# Altium PCB PCB1.PcbDoc
Units mm, origin at the board's own origin, x right, y up, seen from the top; angles counter-clockwise.
Board outline 127.25 x 101.7 mm, 8 copper layers (L1, L2, L3, L4, L5, L6, L7, L8), stack 1.058 mm thick; 57 components, 43 nets, 244 pads, 157 vias.
Unrouted connection lines stored in the file: 9.
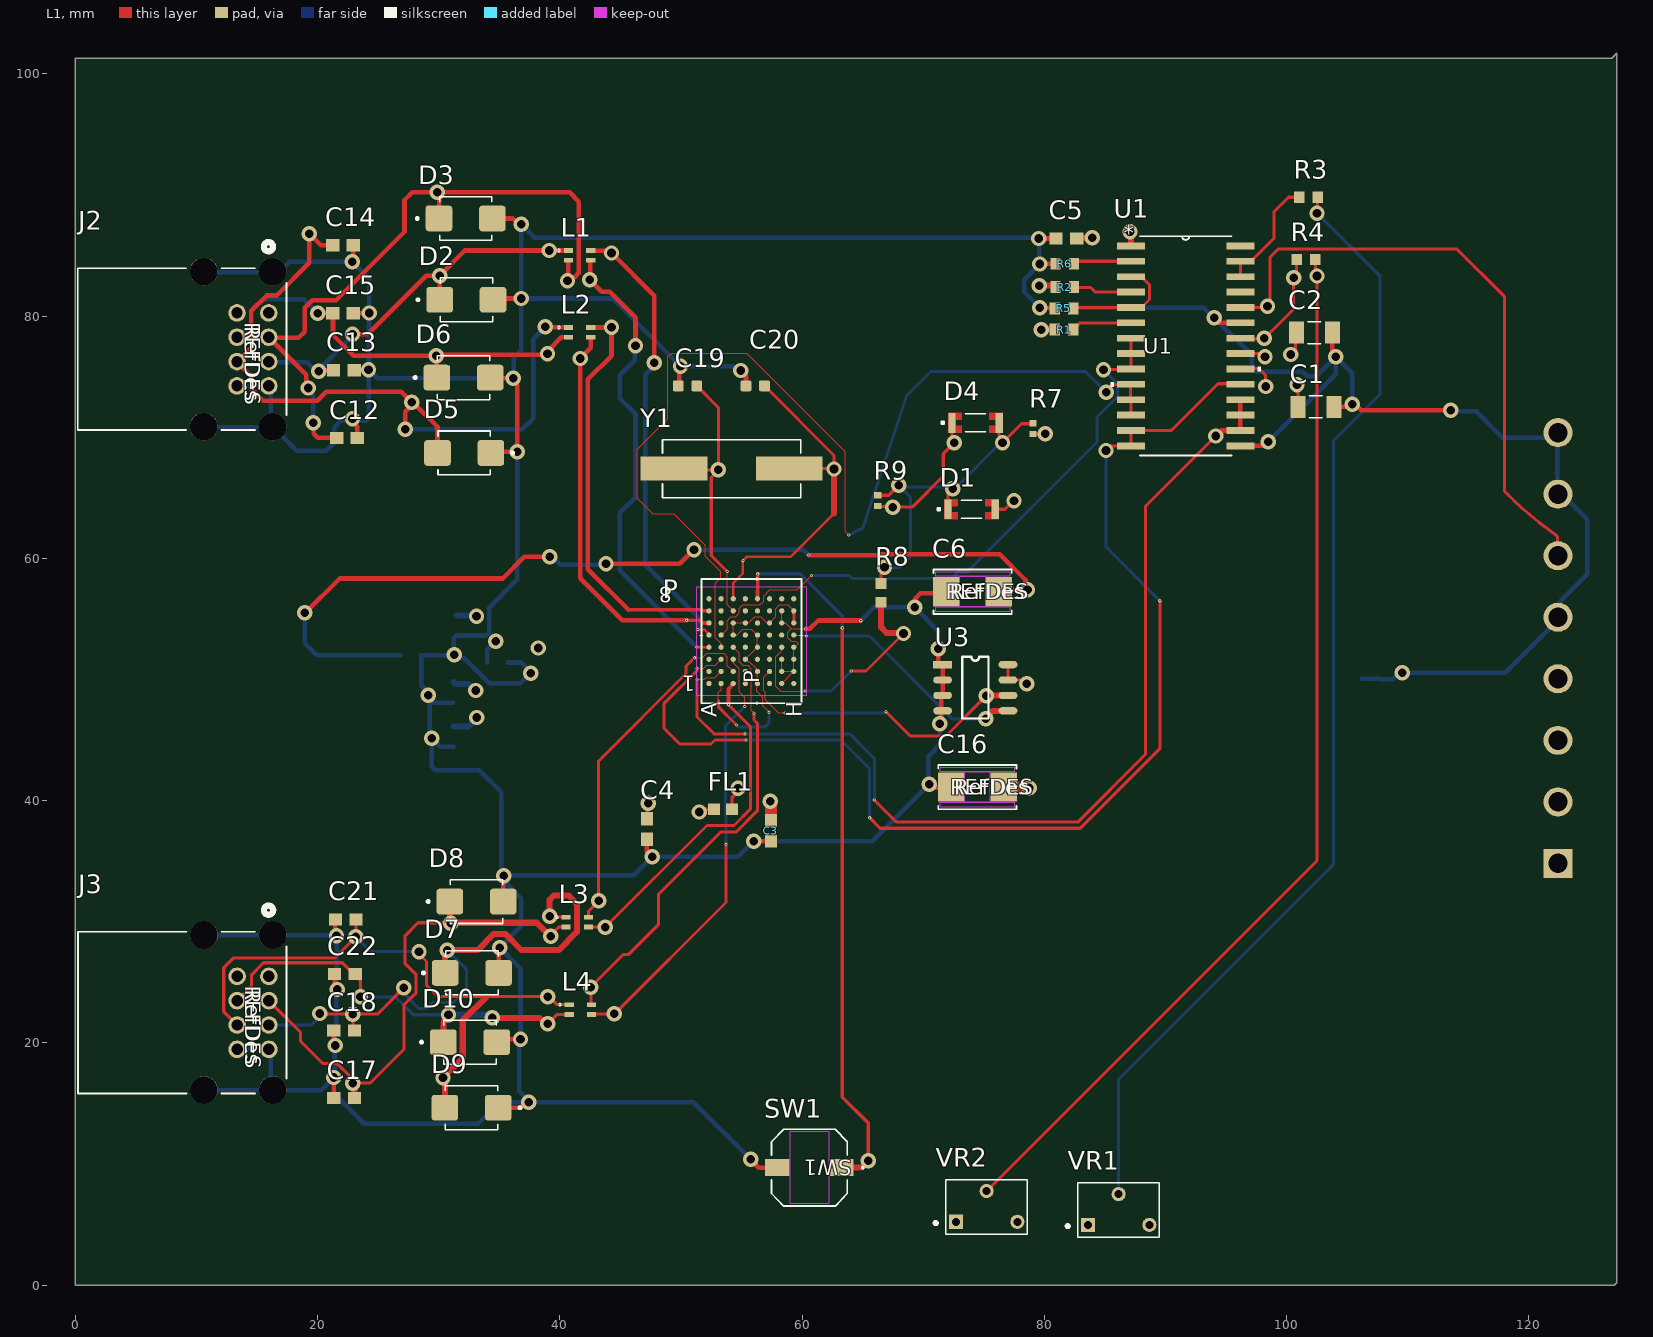
[diagram p0: L1 view]
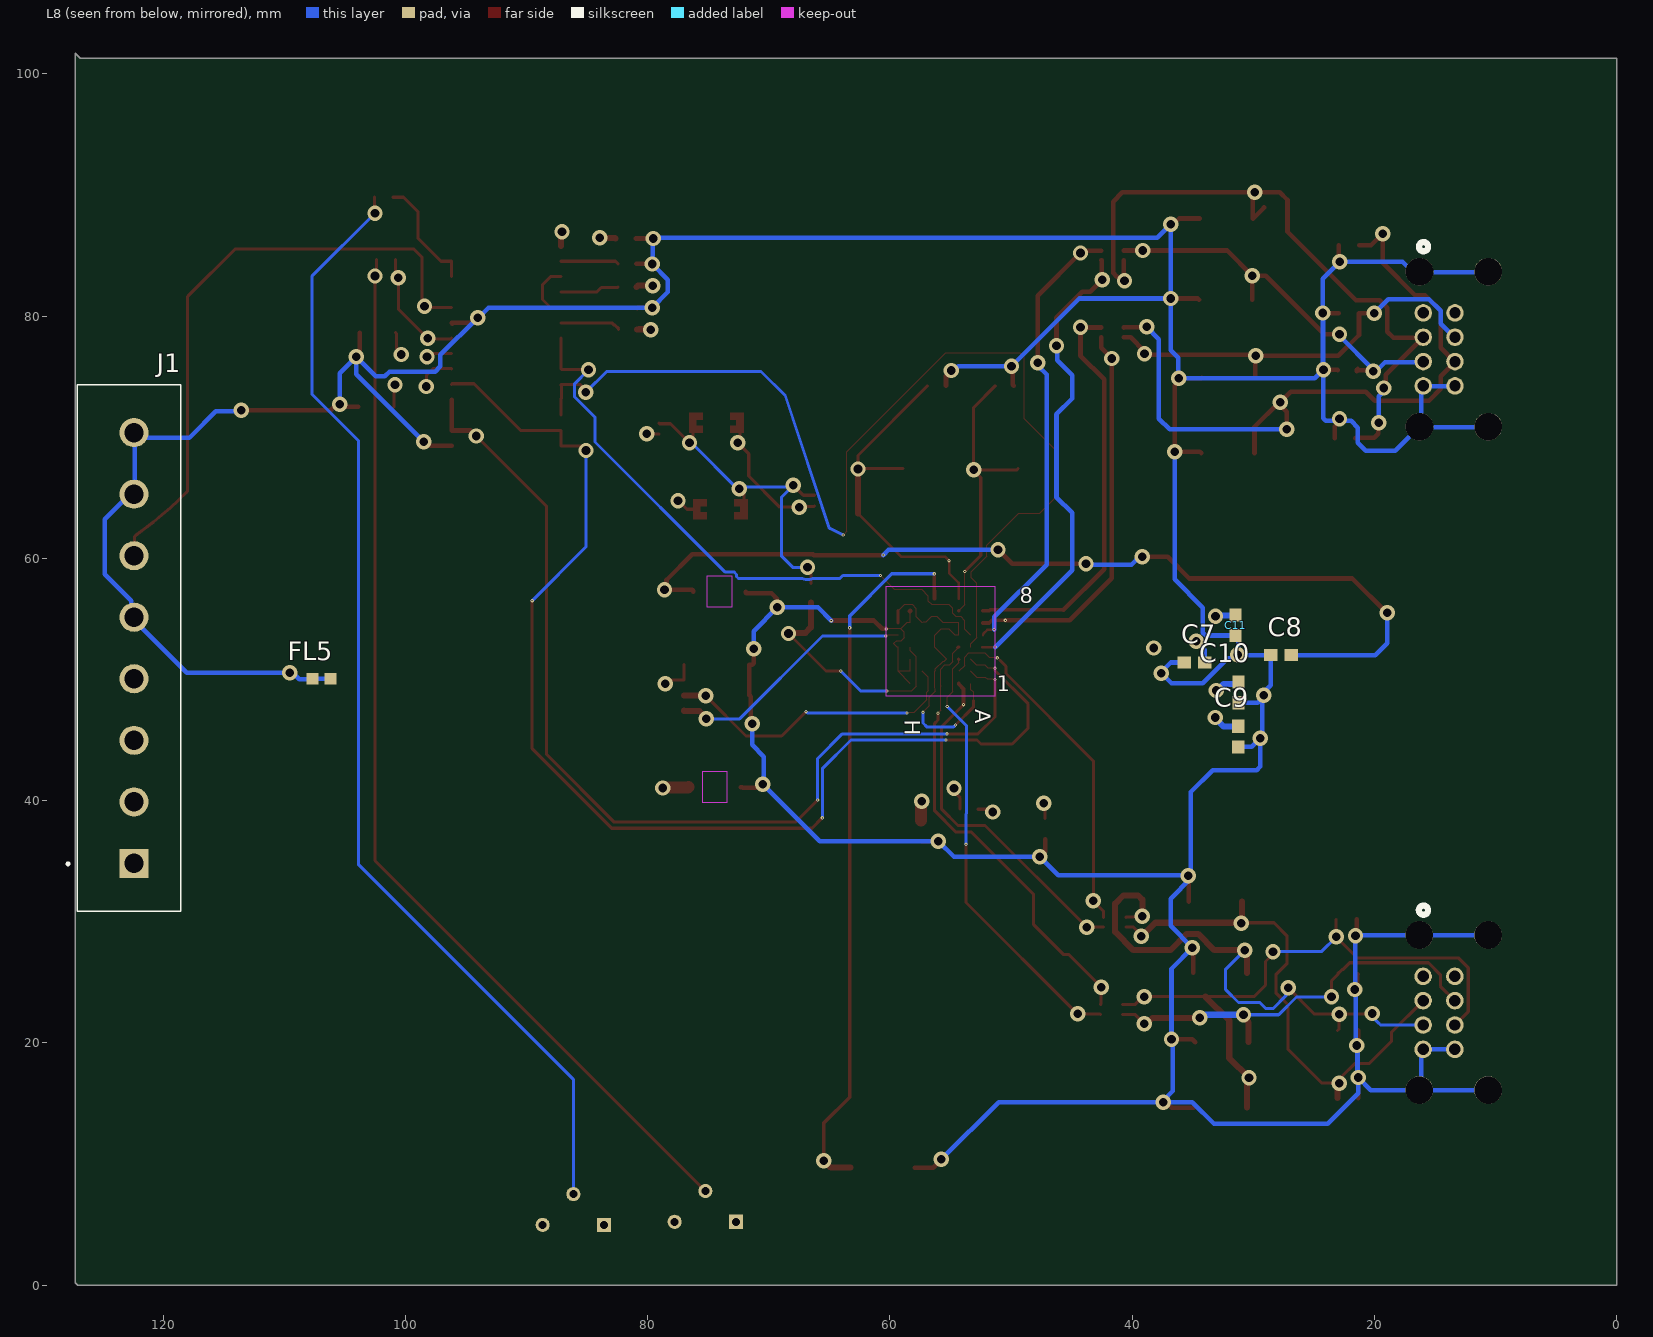
[diagram p1: L8 view, seen from below]
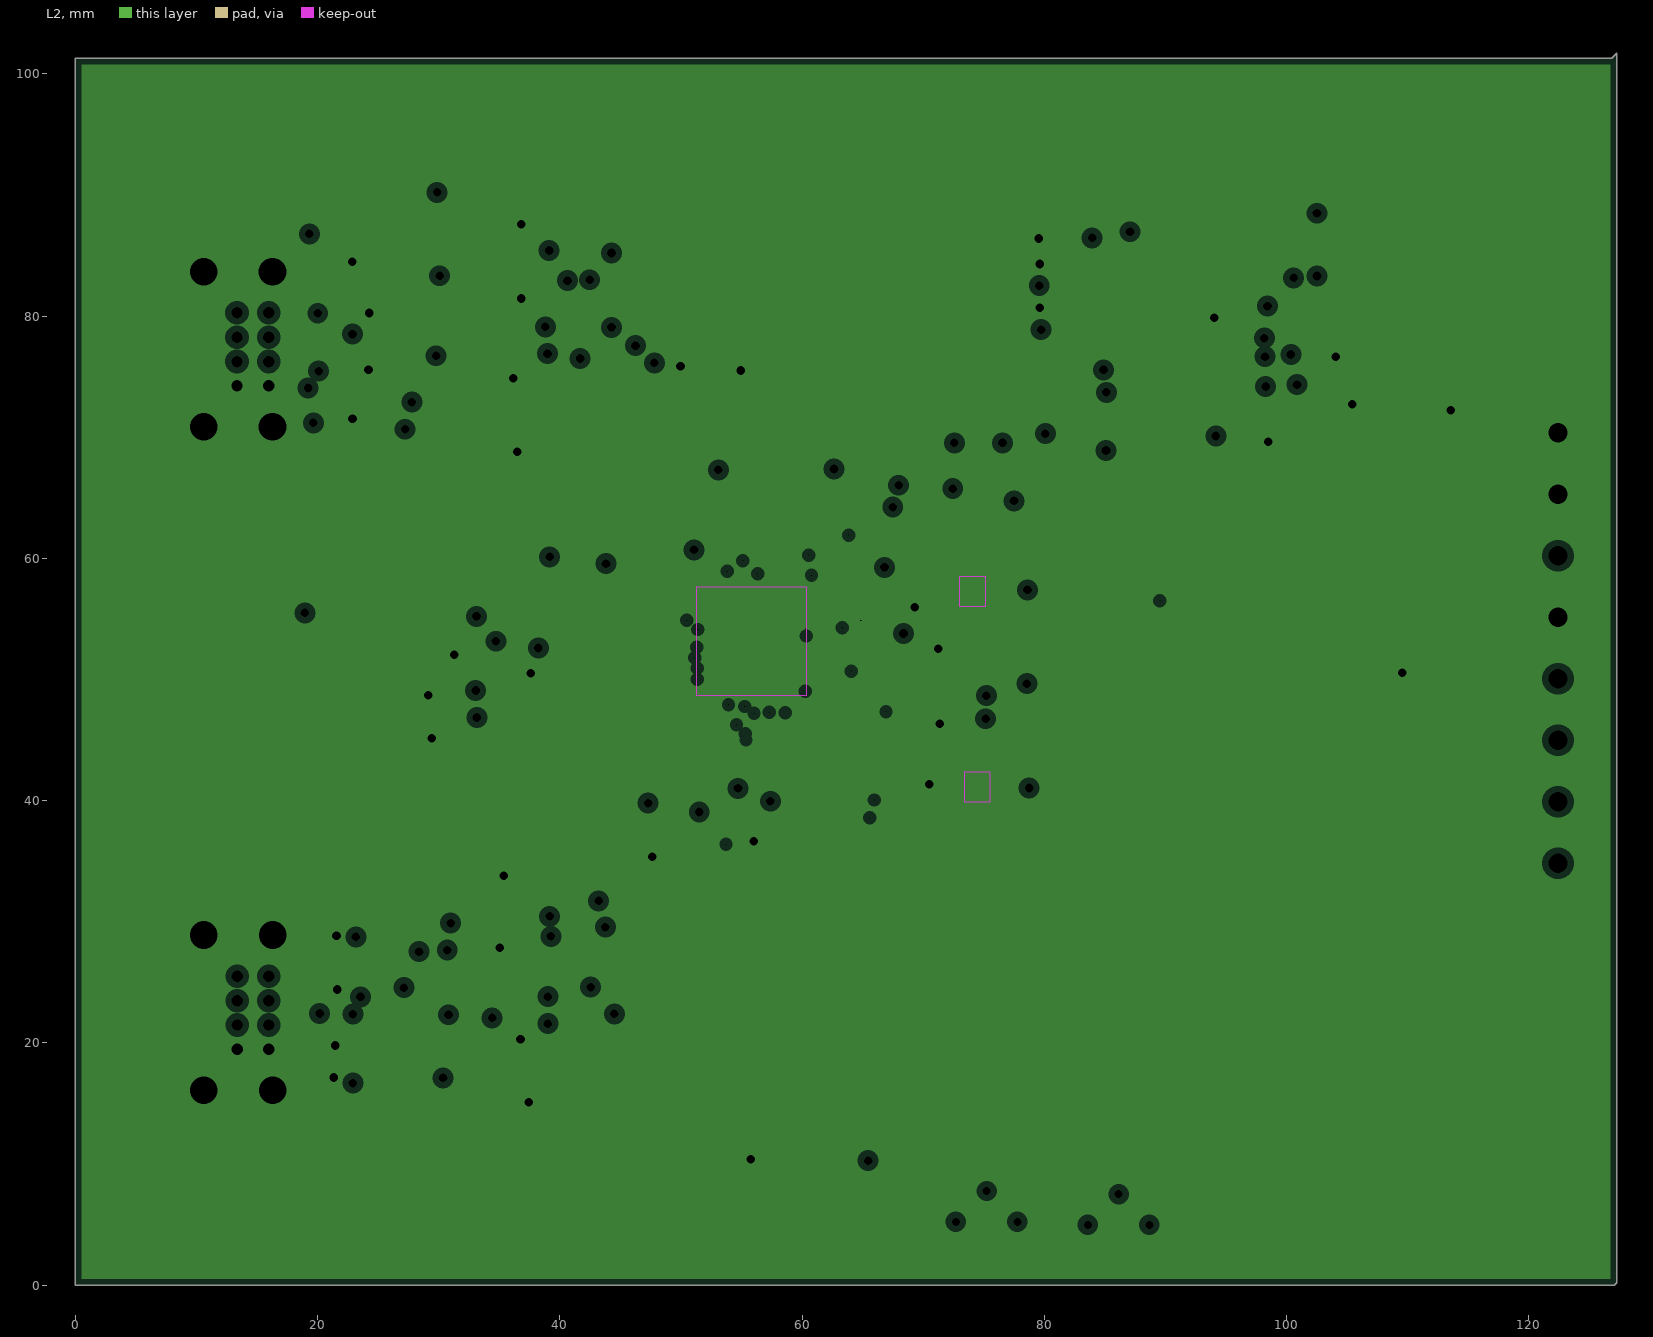
[diagram p2: L2, clearances drawn from the general rule]
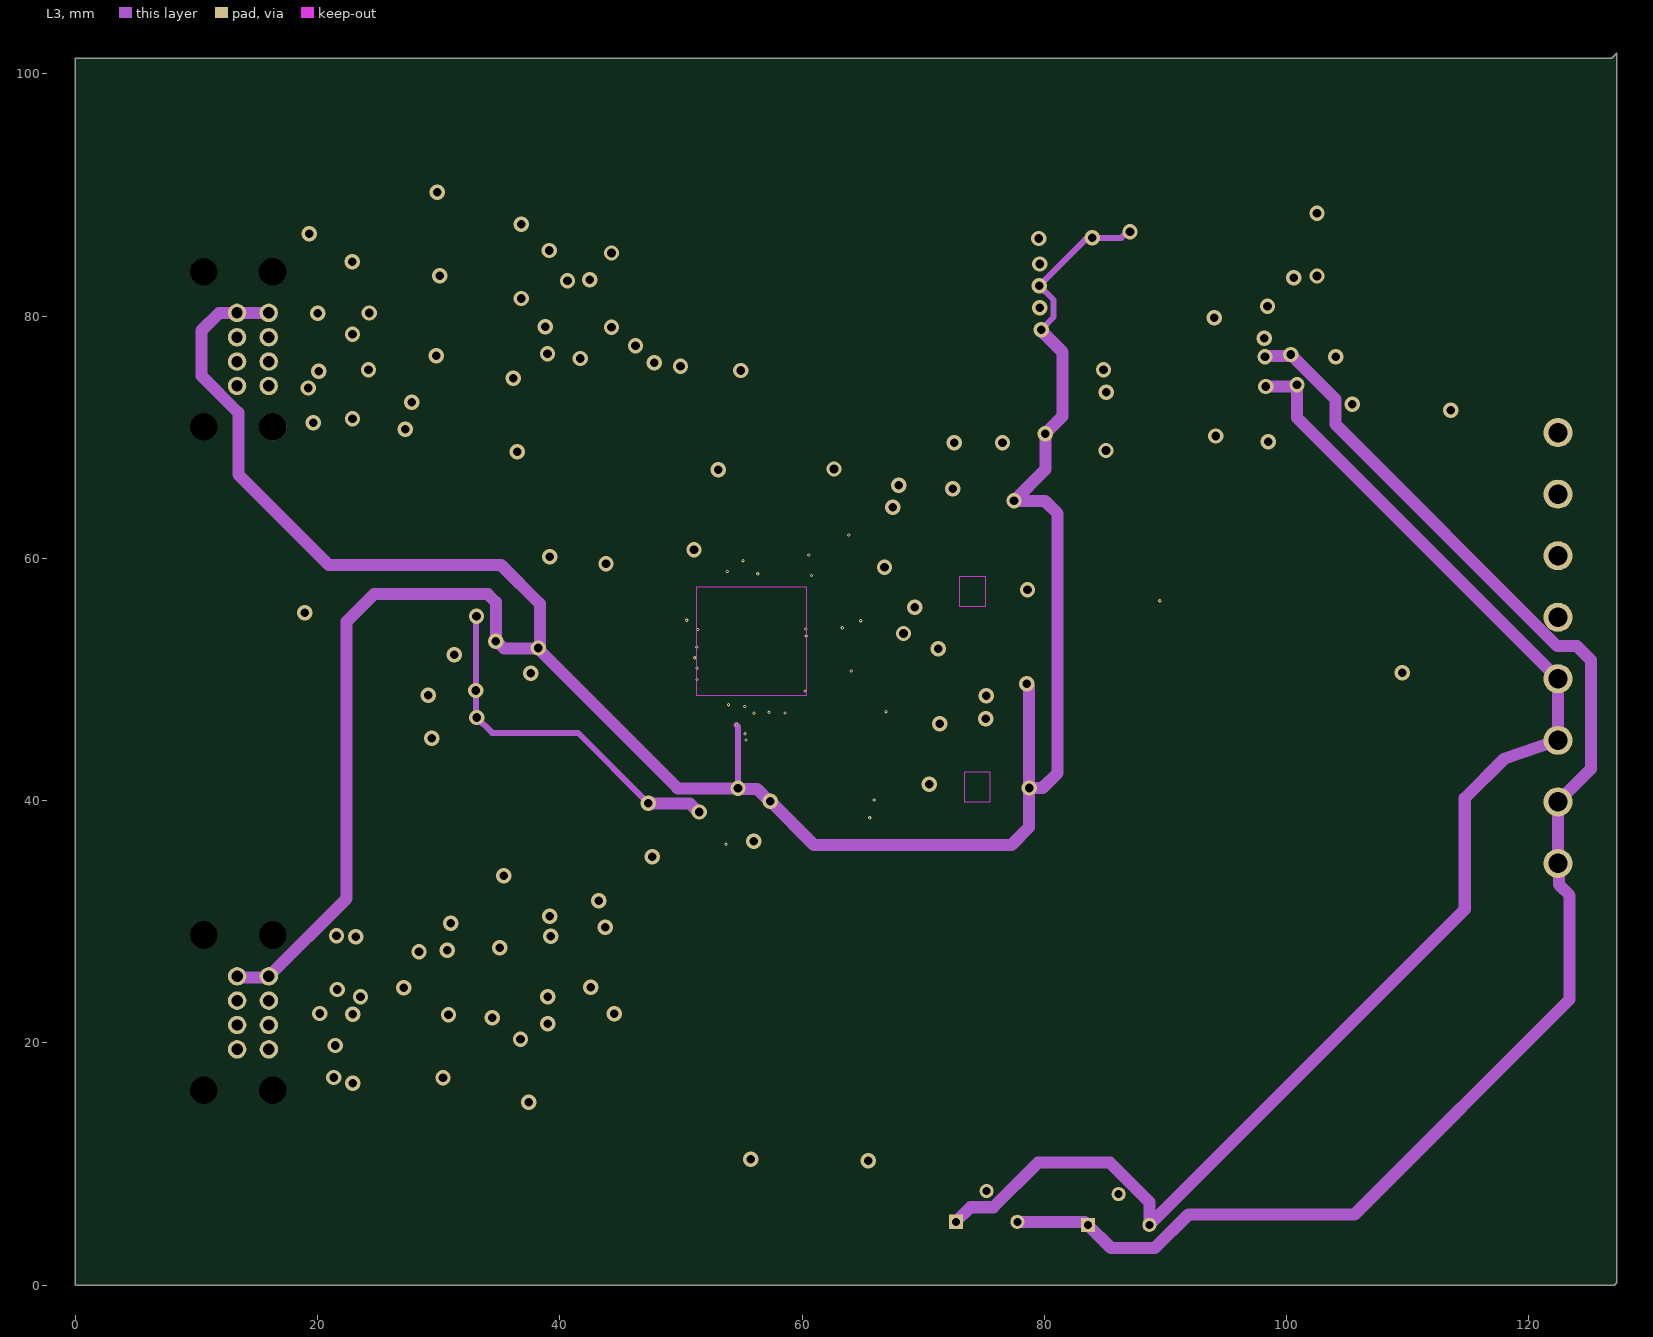
[diagram p3: L3]
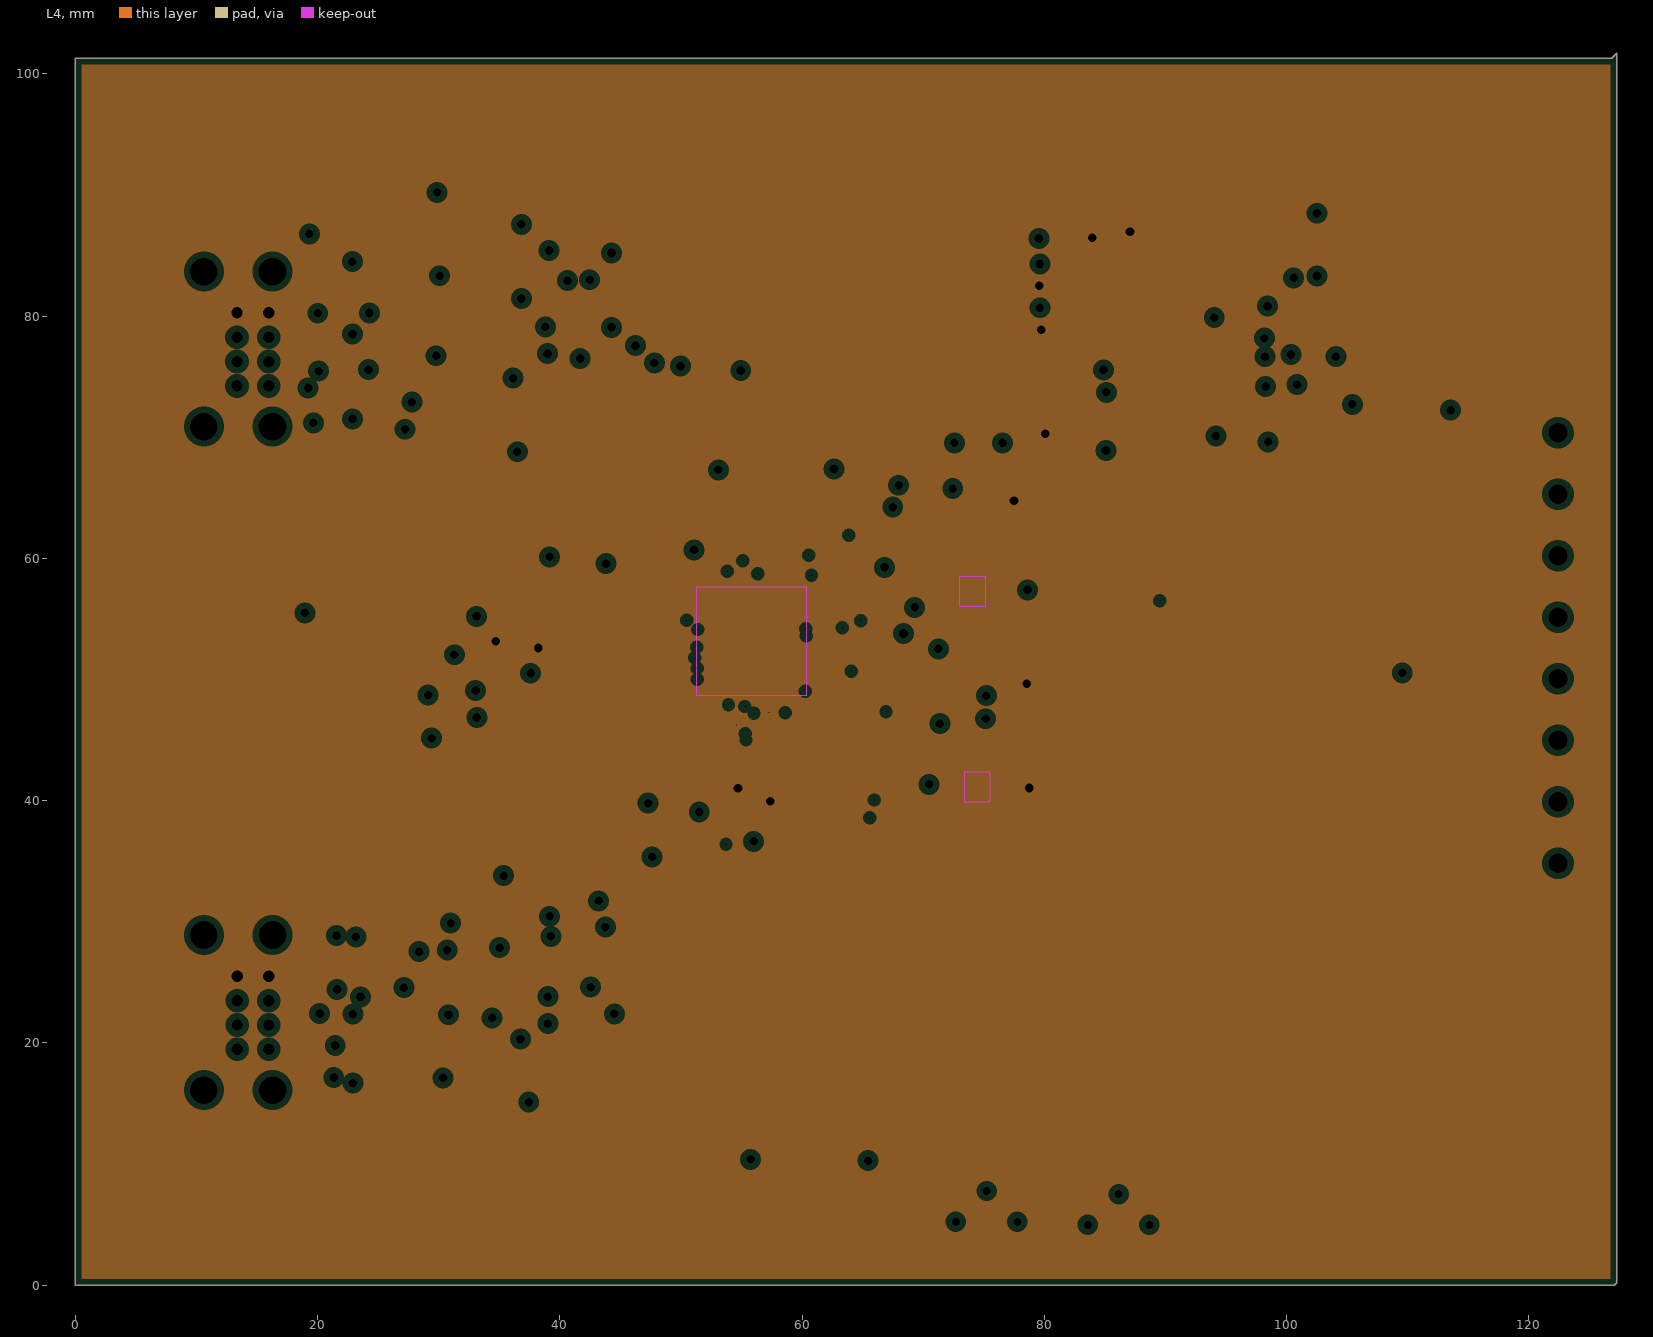
[diagram p4: L4, clearances drawn from the general rule]
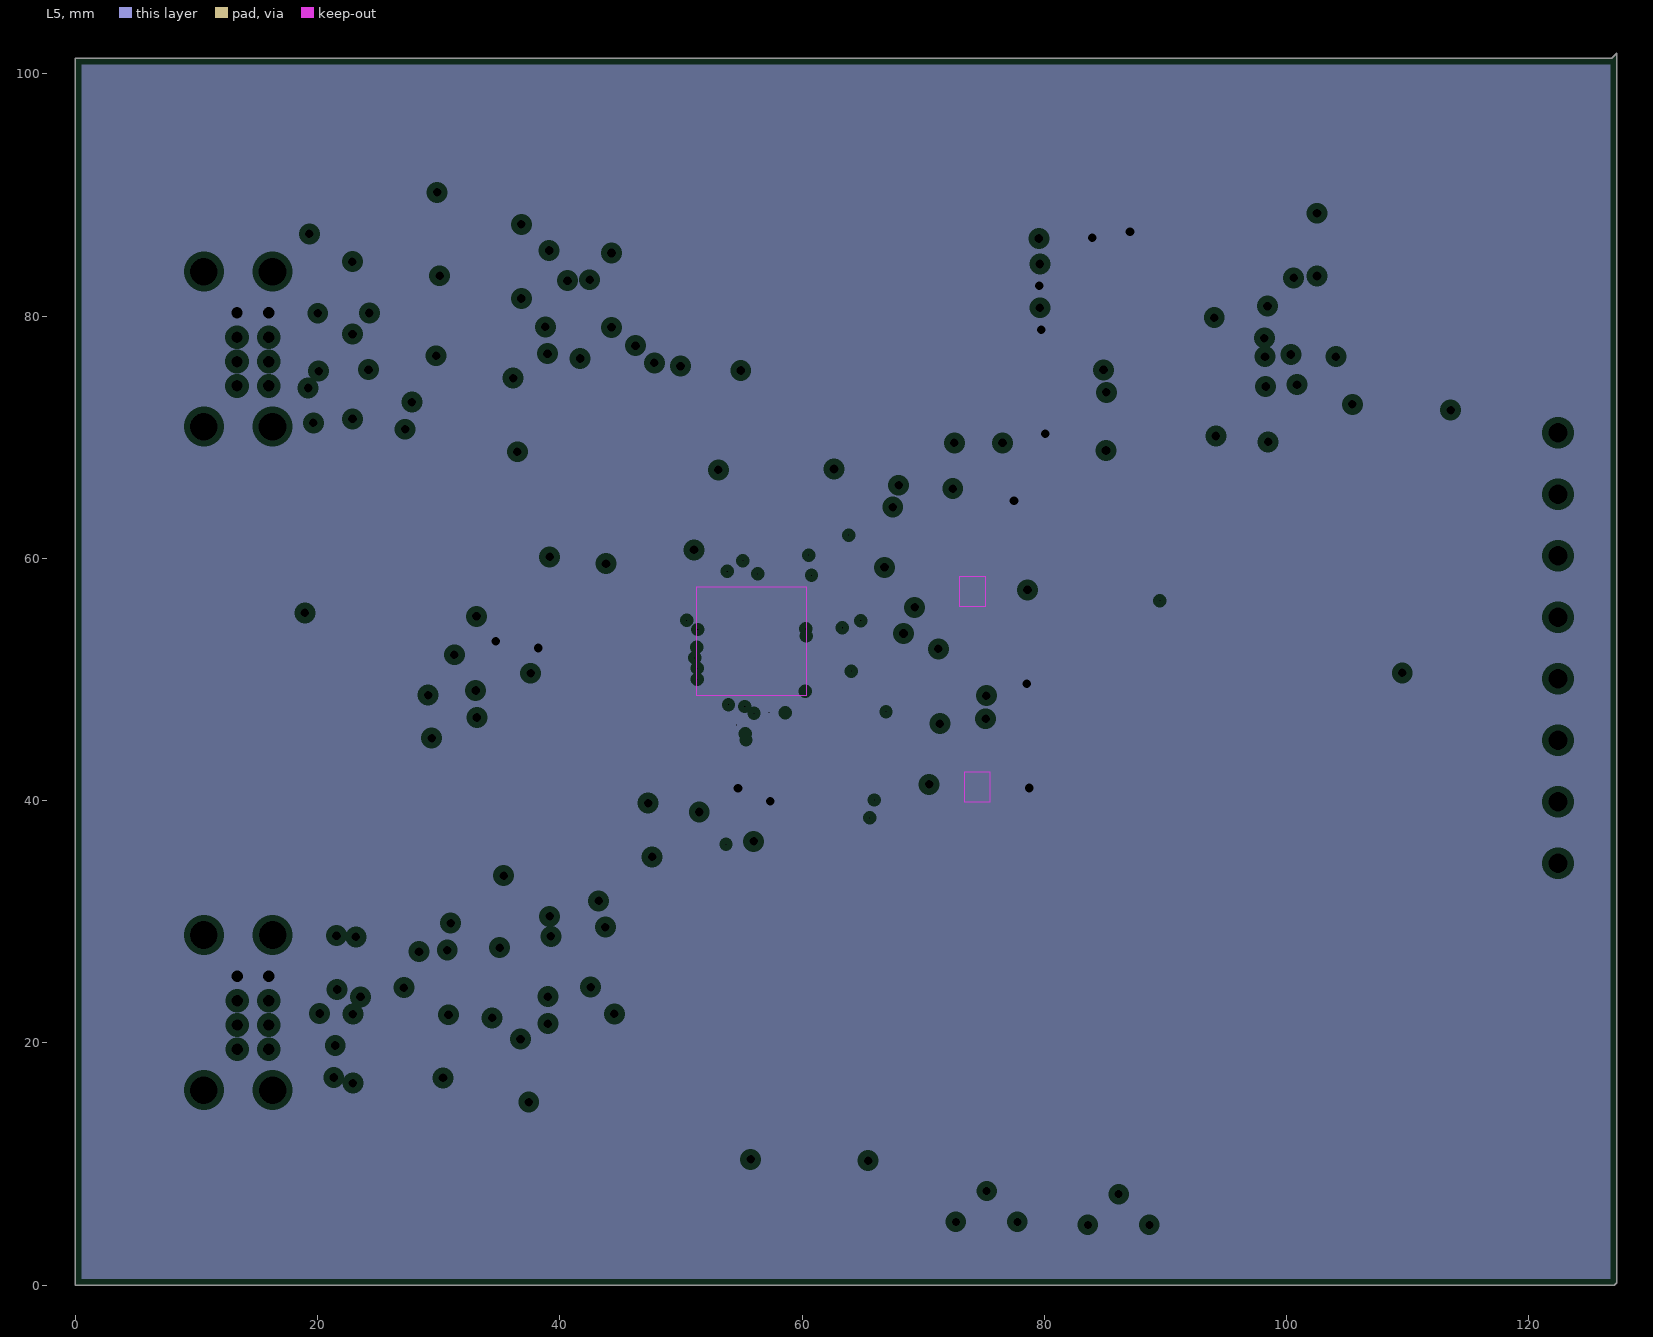
[diagram p5: L5, clearances drawn from the general rule]
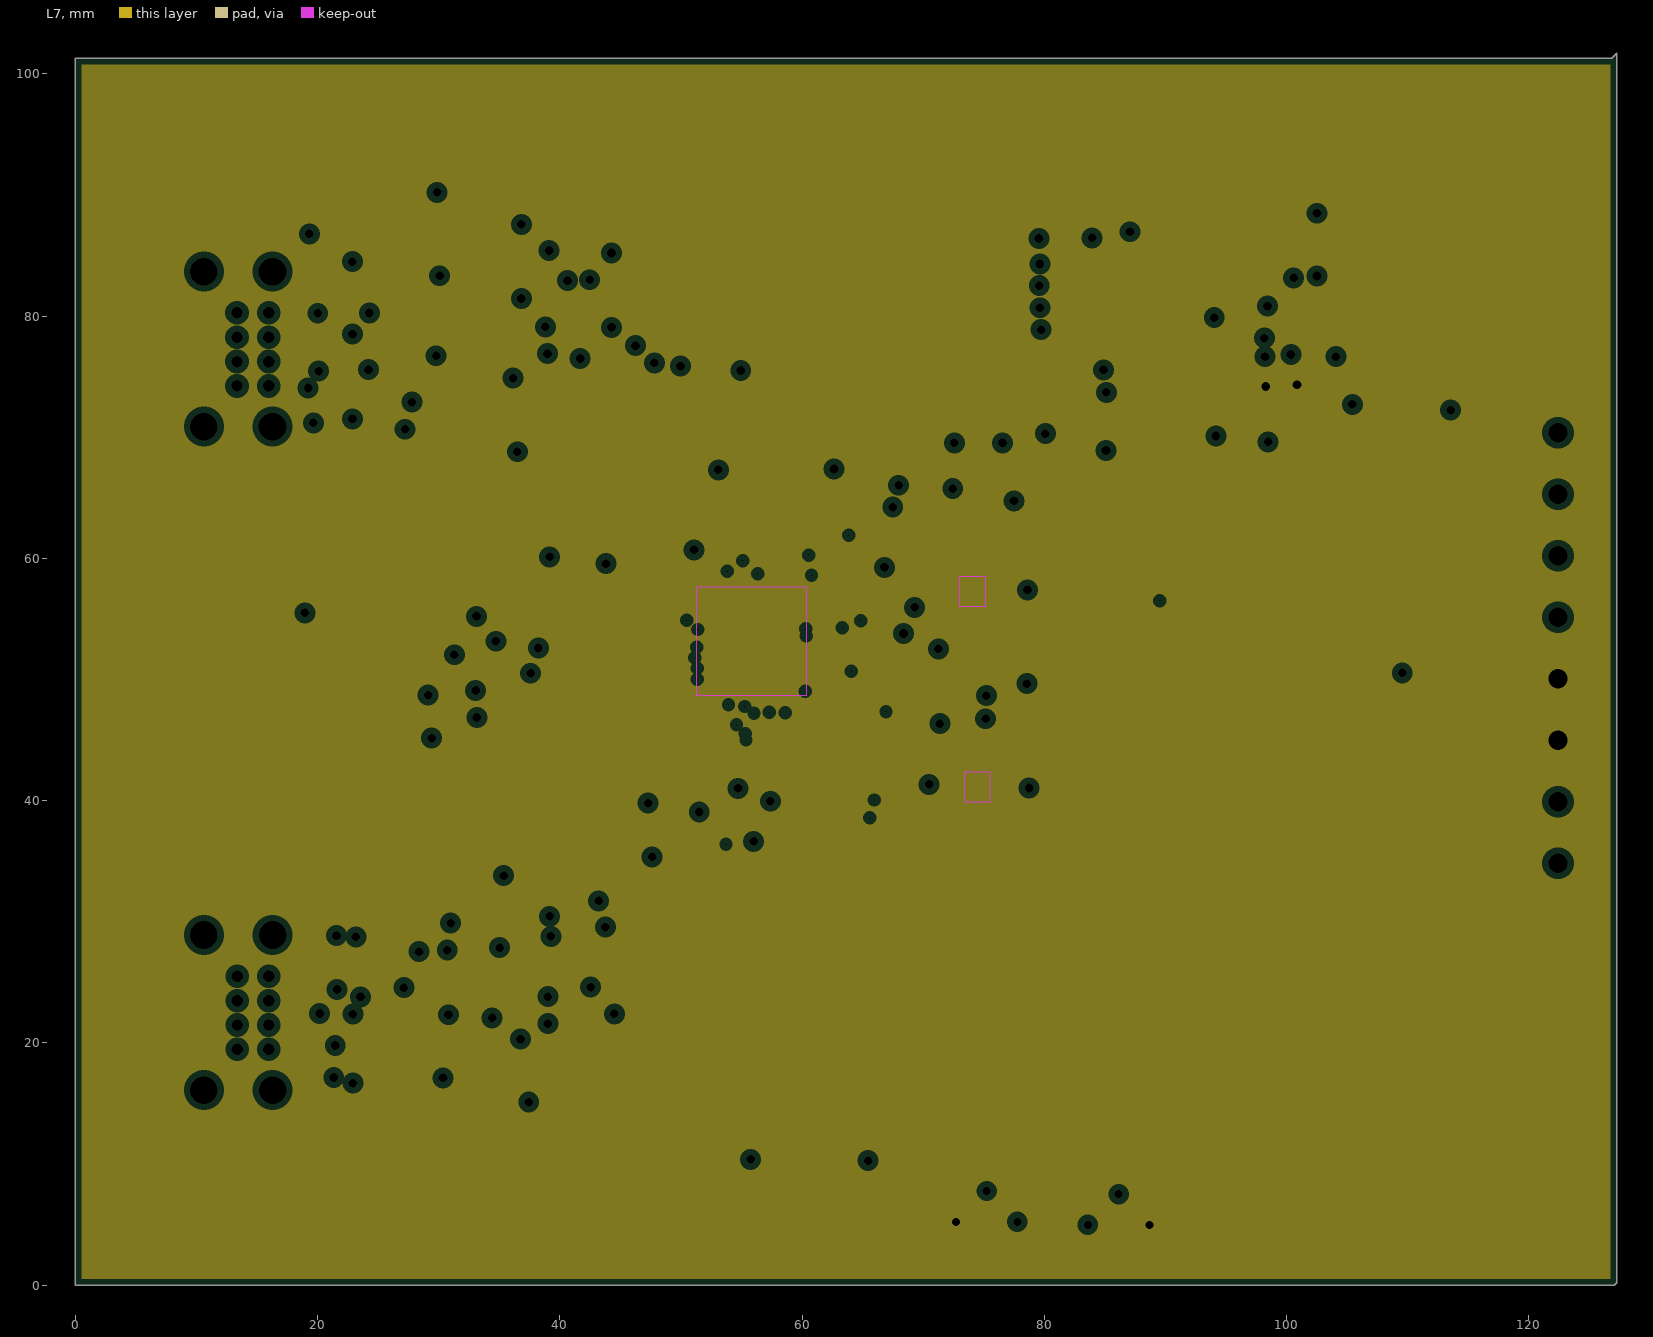
[diagram p6: L7, clearances drawn from the general rule]
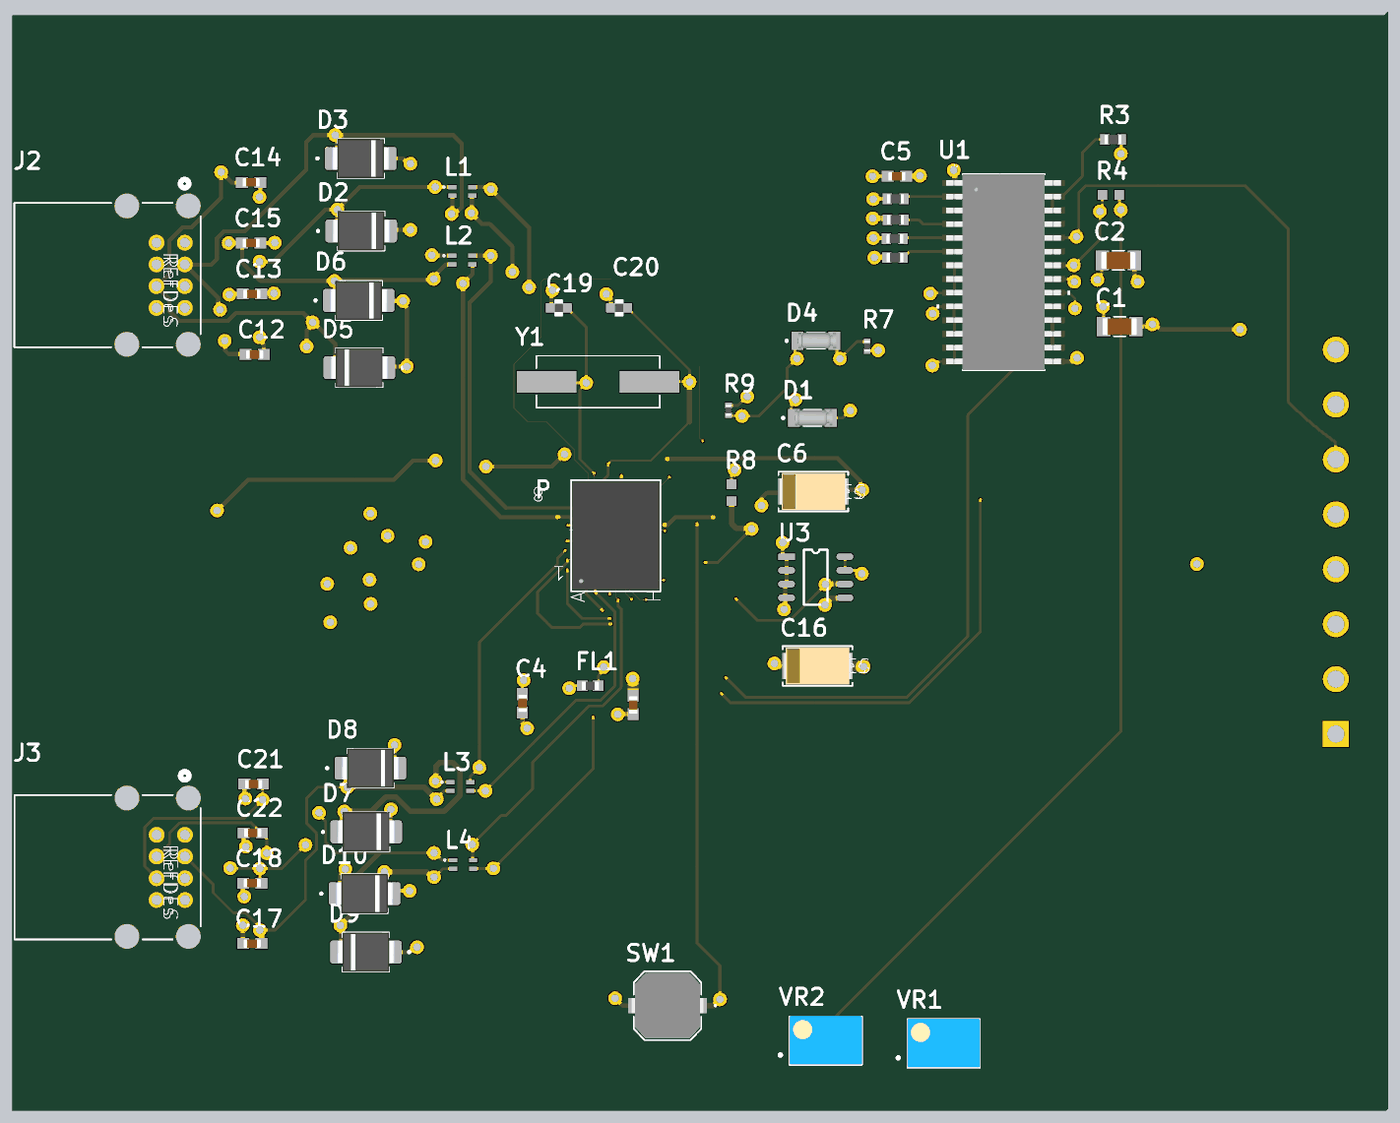
[diagram p7: 3D render of the assembled board from above, using the file's embedded part models]
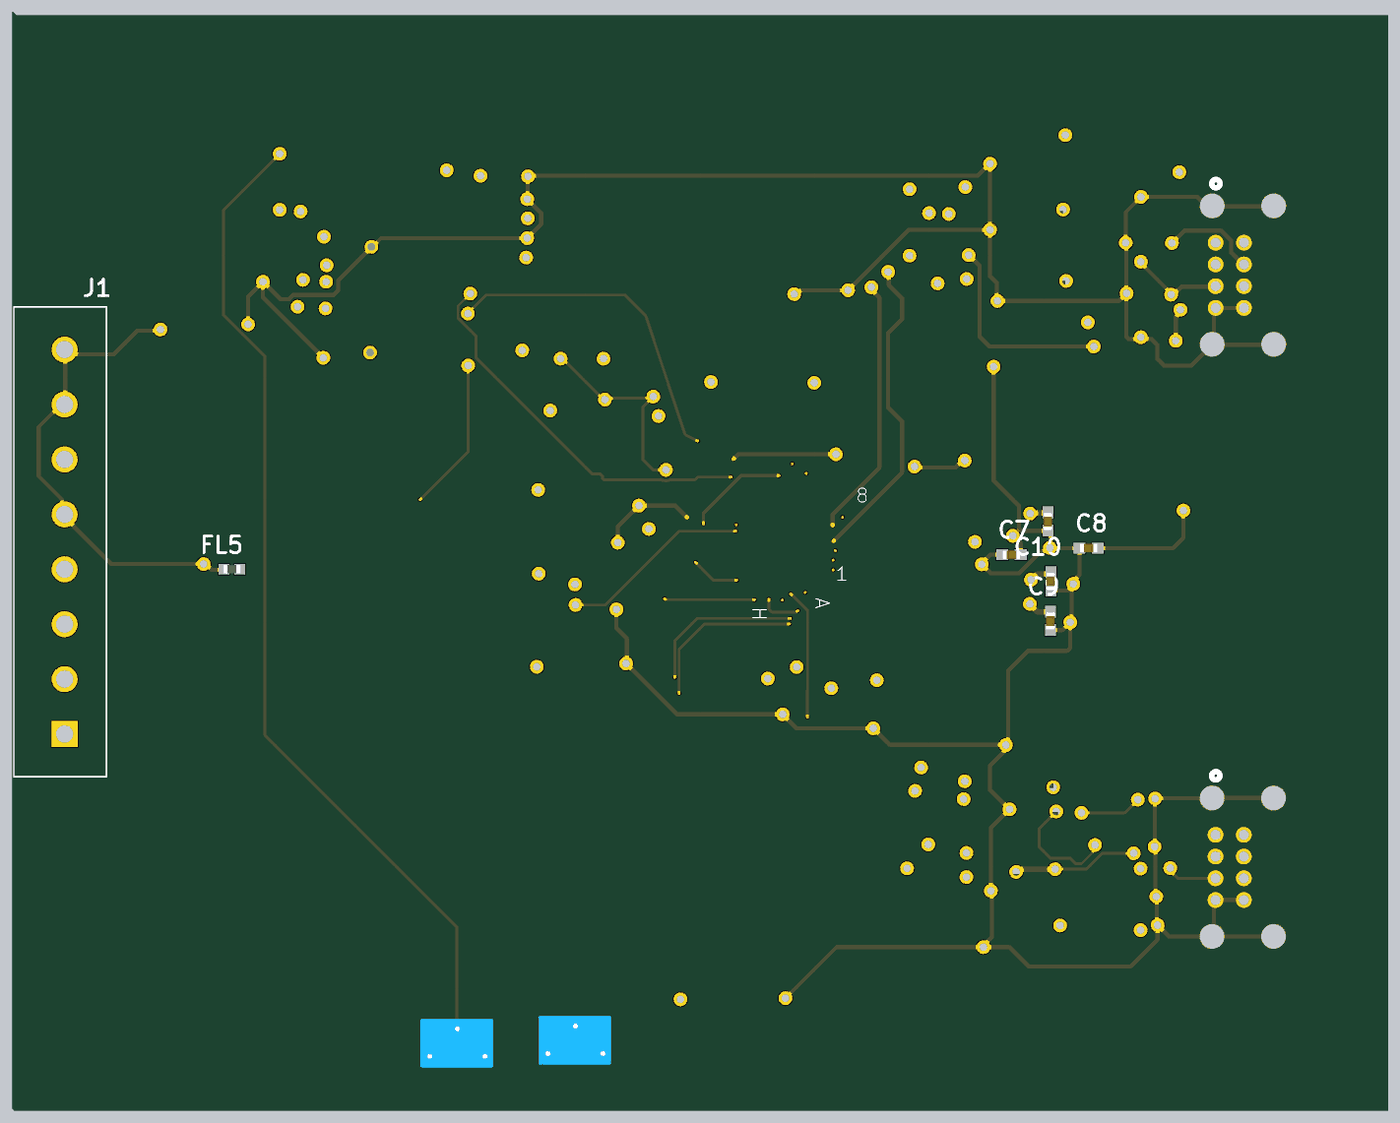
[diagram p8: 3D render of the assembled board from below, using the file's embedded part models]

## Layer stack, top to bottom
Top Solder: solder mask 0.0102, Solder Resist, Dk 3.5
L1: signal copper 0.0503
Dielectric 4: prepreg 0.0711, PP-006, Dk 4.1
L2: plane copper 0.0351, net GND
Dielectric 6: prepreg 0.0711, PP-006, Dk 4.1
L3: signal copper 0.0351
Dielectric 2: prepreg 0.0711, PP-006, Dk 4.1
L4: plane copper 0.0351, net +5V
Dielectric 1: dielectric 0.32, FR-4, Dk 4.8
L5: plane copper 0.0351, net +5V
Dielectric 3: prepreg 0.0711, PP-006, Dk 4.1
L6: signal copper 0.0351
Dielectric 7: prepreg 0.0711, PP-006, Dk 4.1
L7: plane copper 0.0351, net +15V
Dielectric 5: prepreg 0.0711, PP-006, Dk 4.1
L8: signal copper 0.0503
Bottom Solder: solder mask 0.0102, Solder Resist, Dk 3.5

## Board outline
0,0 127.051,0 127.254,0.203 127.254,101.702 126.848,101.295 0,101.295

## Design rules (kind name [scope] priority, off if disabled: settings)
Clearance [All] p1: gap=0 ignorepadtopadclearanceinfootprint=FALSE
MinimumSolderMaskSliver [All] p1: minsoldermaskwidth=0
PlaneClearance [All] p1: clearance=0.508
PlaneConnect [All] p1: planeconnectstyle=Relief reliefexpansion=0.508 reliefentries=4 reliefconductorwidth=0.254 reliefairgap=0.254
PolygonConnect [All] p1: connectstyle=Relief reliefconductorwidth=0 reliefentries=4 polygonreliefangle="90 Angle" airgapwidth=0
RoutingVias [All] p1: holewidth=0.4 width=0.8 viastyle="Through Hole" minholewidth=0.3 minwidth=0.6 maxholewidth=0.5 maxwidth=1
SilkToSilkClearance [All] p1: silktosilkclearance=0
SilkToSolderMaskClearance [IsPad] p1: minsilkscreentomaskgap=0 clearancetoexposedcopper=TRUE
SolderMaskExpansion [All] p1: expansion=0.102 istentingtop=FALSE
SupplyNets "Schematic Supply Nets_4" [InNet('+5V_A')] p1: voltage=0.000
SupplyNets "Schematic Supply Nets_3" [InNet('+5V')] p2: voltage=0.000
SupplyNets "Schematic Supply Nets_2" [InNet('GND')] p3: voltage=0.000
SupplyNets "Schematic Supply Nets_1" [InNet('+15V')] p4: voltage=0.000
SupplyNets "Schematic Supply Nets" [InNet('-15V')] p5: voltage=0.000
Width [All] p1: maxlimit=5 minlimit=0.01 preferedwidth=0.254 minimp=50.000000 maximp=50.000000 favimp=50.000000
25 further rules are at their usual default settings.

## Components (designator, comment, footprint, x,y, rotation, side; value= is the part's Value field where it differs from the comment)
C1 "1uF" VARC3216X85N 102.413,72.517 r0 top
C2 "1uF" VARC3216X85N 102.286,78.638 r0 top
C3 "0.1UF" CAPC1608X90 57.429,37.516 r90 top
C4 "0.1UF" CAPC1608X90 47.193,37.668 r90 top
C5 "0.1 UF" CAPC1608X90 81.813,86.411 r0 top
C6 "10uF" CAP_TCJ-C-2312_KAV 74.079,57.252 r0 top
C7 "0.1uf" CAPC1608X90 34.849,51.41 r180 bottom
C8 "0.1uf" CAPC1608X90 27.711,52.019 r180 bottom
C9 "0.1uf" CAPC1608X90 31.242,45.288 r90 bottom
C10 "0.1uf" CAPC1608X90 31.217,48.946 r90 bottom
C11 "0.1uf" CAPC1608X90 31.471,54.483 r90 bottom
C12 "0.1uf" CAPC1608X90 22.428,69.926 r0 top
C13 "0.1uf" CAPC1608X90 22.174,75.538 r0 top
C14 "0.1uf" CAPC1608X90 22.098,85.85 r180 top
C15 "0.1uf" CAPC1608X90 22.098,80.237 r180 top
C16 "TCJC106M035R0200E" CAP_TCJ-C-2312_KAV 74.473,41.123 r0 top
C17 "0.1uf" CAPC1608X90 22.2,15.441 r180 top
C18 "0.1uf" CAPC1608X90 22.2,21.029 r180 top
C19 "68 PF" C0603 50.544,74.244 r90 top
C20 "68PF" C0603 56.132,74.244 r90 top
C21 "0.1uf" CAPC1608X90 22.327,30.201 r0 top
C22 "0.1uf" CAPC1608X90 22.25,25.679 r0 top
D1 "D2 - LL4148" DIO_LL4148 73.99,64.059 r0 top
D2 "D1" DIOM5336X265N 32.283,81.356 r0 top
D3 "D1" DIOM5336X265N 32.233,88.062 r0 top
D4 "D2 - LL4148" DIO_LL4148 74.32,71.196 r0 top
D5 "D1" DIOM5336X265N 32.106,68.707 r180 top
D6 "D1" DIOM5336X265N 32.055,74.93 r0 top
D7 "D1" DIOM5336X265N 32.741,25.781 r0 top
D8 "D1" DIOM5336X265N 33.126,31.674 r0 top
D9 "D1" DIOM5336X265N 32.715,14.656 r180 top
D10 "D1" DIOM5336X265N 32.588,20.066 r0 top
FL1 "0.1uh" BEADC1608X95N 53.467,39.294 r0 top
FL5 "0.1uh-BLM18AG601SN1D" BEADC1608X95N 106.934,50.063 r0 bottom
J1 "1955918 - CON8" PHOENIX_1955918 118.533,30.883 r90 bottom
J2 "690-008-621-013" CONN8_690-008_EDA#1 15.947,80.288 r270 top
J3 "690-008-621-013" CONN8_690-008_EDA#2 15.957,25.52 r270 top
L1 "Choke ACM2012-900-2P-T002" FIL_ACM2012-900-2P-T002 41.631,85.014 r0 top
L2 "Choke ACM2012-900-2P-T002" FIL_ACM2012-900-2P-T002 41.631,78.664 r0 top
L3 "Choke ACM2012-900-2P-T002" FIL_ACM2012-900-2P-T002 41.453,29.972 r0 top
L4 "Choke ACM2012-900-2P-T002" FIL_ACM2012-900-2P-T002 41.707,22.758 r0 top
P "PC28F512P30BFB TR" BGA64_8X10_MRN 55.818,53.17 r90 top locked
R1 "10k" RESC1508X50N 81.636,78.892 r180 top
R2 "10k" RESC1508X50N 81.686,82.398 r180 top
R3 "1M ohm" RESC1508X50N 101.803,89.814 r0 top
R4 "3.9k ohm - CRCW06033K90FKEAC" RESC1608X55N 101.6,84.684 r0 top
R5 "10K" RESC1508X50N 81.61,80.645 r0 top
R6 "10K" RESC1508X50N 81.686,84.328 r0 top
R7 "100K - CRCW0402100KFKED" RESC1005X40N 79.07,70.714 r270 top
R8 "2.2K ohm" RESC1608X55N 66.523,57.15 r90 top
R9 "100K - CRCW0402100KFKED" RESC1005X40N 66.243,64.77 r90 top
SW1 "EVPASJC1A" SW_EVPASJC1A_PAN 60.604,9.703 r180 top
U1 "DAC811JU" DW28 91.669,77.546 r0 top
U3 "U2 - AT2402" AT24C02 71.603,51.232 r0 top
VR1 "100K" TRIM_3266W-1-104LF 86.131,4.978 r0 top
VR2 "100K" TRIM_3266W-1-104LF 75.235,5.232 r0 top
Y1 "25 M HZ" XTAL_ECS-150-18-5PXEN 54.178,67.412 r0 top

## Footprints (in the part's own frame and the unit in brackets; to place one, negate y for a bottom-side part, rotate by r counter-clockwise, add the part's x,y. Pads: shape width x height; smd on the part's side, far side on the other; paste and mask are expansions set on the pad)
AT24C02 [mm]
  rect 1.55x0.6 smd: 1(0,0)
  oval 1.55x0.6 smd: 2(0,-1.27) 3(0,-2.54) 4(0,-3.81) 5(5.4,-3.81) 6(5.4,-2.54) 7(5.4,-1.27) 8(5.4,0)
  silkscreen extent 1.61,-4.44 3.79,0.64
BEADC1608X95N [mm]
  rect 1x0.97 smd: 1(-0.735,0) 2(0.735,0)
  body extent -0.8,-0.4 0.8,0.4, height 0.95
BGA64_8X10_MRN [mm]
  round 0.432 smd paste+0 mask+0: A1(-3.5,3.5) A2(-2.5,3.5) A3(-1.5,3.5) A4(-0.5,3.5) A5(0.5,3.5) A6(1.5,3.5) A7(2.5,3.5) A8(3.5,3.5) B1(-3.5,2.5) B2(-2.5,2.5) B3(-1.5,2.5) B4(-0.5,2.5) B5(0.5,2.5) B6(1.5,2.5) B7(2.5,2.5) B8(3.5,2.5) C1(-3.5,1.5) C2(-2.5,1.5) C3(-1.5,1.5) C4(-0.5,1.5) C5(0.5,1.5) C6(1.5,1.5) C7(2.5,1.5) D1(-3.5,0.5) D2(-2.5,0.5) D3(-1.5,0.5) D4(-0.5,0.5) D5(0.5,0.5) D6(1.5,0.5) D7(2.5,0.5) D8(3.5,0.5) E1(-3.5,-0.5) E2(-2.5,-0.5) E3(-1.5,-0.5) E4(-0.5,-0.5) E5(0.5,-0.5) E6(1.5,-0.5) E7(2.5,-0.5) E8(3.5,-0.5) F1(-3.5,-1.5) F2(-2.5,-1.5) F3(-1.5,-1.5) F4(-0.5,-1.5) F5(0.5,-1.5) F6(1.5,-1.5) F7(2.5,-1.5) F8(3.5,-1.5) G1(-3.5,-2.5) G2(-2.5,-2.5) G3(-1.5,-2.5) G4(-0.5,-2.5) G5(0.5,-2.5) G6(1.5,-2.5) G7(2.5,-2.5) G8(3.5,-2.5) H1(-3.5,-3.5) H2(-2.5,-3.5) H3(-1.5,-3.5) H4(-0.5,-3.5) H5(0.5,-3.5) H6(1.5,-3.5) H7(2.5,-3.5) H8(3.5,-3.5) ""(3.5,1.5)
  Keep-Out Layer region: -4.508,-4.508 -4.508,4.508 4.508,4.508 4.508,-4.508
  silkscreen extent -5.26,-4.25 5.26,4.25, body extent -5,-4 5,4, height 1.2
C0603 [mil]
  rrect25% 35x35 smd: 1(0,30) 2(0,-30)
  body extent -31,-16 31,16, height 35
CAP_TCJ-C-2312_KAV [mil]
  rect 85x95 smd paste+0 mask+0: 1(-85.5,0) 2(85.5,0)
  L1 keep-out region: -41,-49.5 -41,49.5 41,49.5 41,-49.5
  L1 keep-out region: -120,49.5 -120,65 120,65 120,49.5
  L1 keep-out region: -120,-65 -120,-49.5 120,-49.5 120,-65
  Keep-Out Layer region: -41,-49.5 -41,49.5 41,49.5 41,-49.5
  silkscreen extent -127,-72 127,72, body extent -122,-67 122,67, height 112
CAPC1608X90 [mm]
  rect 1.1x1 smd: 1(-0.85,0) 2(0.85,0)
  body extent -0.8,-0.4 0.8,0.4, height 0.95
CONN8_690-008_EDA#1 [mil]
  round 57 / inner round 60 / far side round 57 hole 37 paste-99999 mask+0: 1(0.73,-102.15) 2(79.87,-102.15) 3(159,-102.15) 4(238.13,-102.15) 5(0.73,1) 6(79.87,1) 7(159,1) 8(238.13,1)
  round 90 / inner round 60 / far side round 90 hole 90 paste-99999 mask+0: 9(-133.27,13.39) 11(-133.27,-210.24) 12(370.67,-210.24)
  round 90 hole 90 paste-99999 mask+0: 10(370.67,13.39)
  silkscreen extent -229,-620 382,58
CONN8_690-008_EDA#2 [mil]
  round 57 / inner round 60 / far side round 57 hole 37 paste-99999 mask+0: 1(0.73,-102.15) 2(79.87,-102.15) 3(159,-102.15) 4(238.13,-102.15) 5(0.73,1) 6(79.87,1) 7(159,1) 8(238.13,1)
  round 90 / inner round 60 / far side round 90 hole 90 paste-99999 mask+0: 9(-133.27,13.39) 10(370.67,13.39) 11(-133.27,-210.24) 12(370.67,-210.24)
  silkscreen extent -229,-620 382,58
DIO_LL4148 [mm]
  rect 0.6x1.65 smd paste+0 mask+0.102: A(1.95,0) C(-1.95,0)
  L1 region: 2.25,-0.825 1.15,-0.825 1.15,-0.25 1.65,-0.25 1.65,0.25 1.15,0.25 1.15,0.825 2.25,0.825
  L1 region: -1.15,0.25 -1.65,0.25 -1.65,-0.25 -1.15,-0.25 -1.15,-0.825 -2.24,-0.825 -2.24,0.825 -1.15,0.825
  silkscreen extent -2.8,-0.75 0.83,0.75, body extent -1.62,-0.72 1.88,0.76, height 0.74
DIOM5336X265N [mm]
  rrect24% 2.2x2.12 smd paste+0 mask+0.102: 1(-2.205,0) 2(2.205,0)
  silkscreen extent -4.1,-1.81 2.16,1.81, body extent -2.68,-1.81 2.68,1.81, height 2.65
DW28 [mil]
  rect 91x22 smd paste-45.5 mask-45.5: 1(-178,325) 2(-178,275) 3(-178,225) 4(-178,175) 5(-178,125) 6(-178,75) 7(-178,25) 8(-178,-25) 9(-178,-75) 10(-178,-125) 11(-178,-175) 12(-178,-225) 13(-178,-275) 14(-178,-325) 15(178,-325) 16(178,-275) 17(178,-225) 18(178,-175) 19(178,-125) 20(178,-75) 21(178,-25) 22(178,25) 23(178,75) 24(178,125) 25(178,175) 26(178,225) 27(178,275) 28(178,325)
  silkscreen extent -244,-356 244,356, body extent -209,-356 209,356, height 104
FIL_ACM2012-900-2P-T002 [mm]
  rect 0.75x0.4 smd: 1(-0.925,0.4) 2(-0.925,-0.4) 3(0.925,-0.4) 4(0.925,0.4)
  silkscreen extent -1.8,0.3 -1.6,0.5
PHOENIX_1955918 [mm]
  rect 2.4x2.4 / inner round 2.4 / far side rect 2.4x2.4 hole 1.6: 1(3.94,3.87)
  round 2.4 hole 1.6: 2(9.02,3.87) 3(14.1,3.87) 4(19.18,3.87) 5(24.26,3.87) 6(29.34,3.87) 7(34.42,3.87) 8(39.5,3.87)
  silkscreen extent 0,0 43.44,9.42
RESC1005X40N [mm]
  rect 0.51x0.6 smd: 1(-0.445,0) 2(0.445,0)
  body extent -0.5,-0.25 0.5,0.25, height 0.4
RESC1508X50N [mm]
  rect 0.86x0.98 smd: 1(-0.765,0) 2(0.765,0)
  body extent -0.77,-0.43 0.77,0.43, height 0.55
RESC1608X55N [mm]
  rect 0.87x0.93 smd: 1(-0.78,0) 2(0.78,0)
SW_EVPASJC1A_PAN [mm]
  rect 2x1.397 smd paste+0 mask+0: 1(-2.65,0) 2(2.65,0)
  L1 keep-out region: -1.599,-2.997 -1.599,2.997 1.599,2.997 1.599,-2.997
  silkscreen extent -4.49,-3.18 3.13,3.18, body extent -3.3,-3.05 3.3,3.05, height 5.31
TRIM_3266W-1-104LF [mm]
  rect 1.168x1.168 hole 0.66: 1(-2.54,0)
  round 1.168 hole 0.66: 2(0,2.54) 3(2.54,0)
  silkscreen extent -4.3,-1.02 3.35,3.48, body extent -3.35,-0.98 3.35,3.52, height 4.64
VARC3216X85N [mm]
  rect 1.24x1.82 smd: 1(-1.485,0) 2(1.485,0)
  silkscreen extent -0.54,-0.9 0.54,0.9, body extent -1.6,-0.8 1.6,0.8, height 0.88
XTAL_ECS-150-18-5PXEN [mm]
  rect 5.5x2 smd: 1(-4.75,0) 2(4.75,0)
  silkscreen extent -5.7,-2.4 5.7,2.4

## Part data
C1 C2: library part "1uF - C1206C104K5RACTU", "Capacitor;Ceramic;Cap;.1 uF;Tol+10%;SMT;Vol-Rtg 50V;X7R;TR", Package="1206-2 KEMET", Check_prices=https://www.snapeda.com/parts/C1206C104K5RACTU/KEMET/view-part/?ref=eda, MF=KEMET, MP=C1206C104K5RACTU, SnapEDA_Link=https://www.snapeda.com/parts/C1206C104K5RACTU/KEMET/view-part/?ref=snap
C3 C4 C5 C7 C8 C9 C10 C11 C12 C13 C14 C15 C17 C18 C21 C22: library part "0.1uf - C0603C104K5RACTU", "0.1 ÂµF Â±10% 50V Ceramic Capacitor X7R 0603 (1608 Metric)", Package="603-2 KEMET", Check_prices=https://www.snapeda.com/parts/C0603C104K5RACTU/KEMET/view-part/?ref=eda, MF=KEMET, MP=C0603C104K5RACTU, SnapEDA_Link=https://www.snapeda.com/parts/C0603C104K5RACTU/KEMET/view-part/?ref=snap
C6: library part "10UF - TCJC106M035R0200E", "Description", Manufacturer_Name="KYOCERA AVX", Manufacturer_Part_Number=TCJC106M035R0200E, Copyright="Copyright (C) 2025 Ultra Librarian. All rights reserved.", Type="Tantalum-Polymer Capacitors"
C16: library part "10UF - TCJC106M035R0200E", "Description", Manufacturer_Name="KYOCERA AVX", Copyright="Copyright (C) 2025 Ultra Librarian. All rights reserved.", Manufacturer_Part_Number=TCJC106M035R0200E, Type="Tantalum-Polymer Capacitors"
C19 C20: library part "68 PF - CERAMIC-68PF-50V-5%-NPO(0603)", "68 pF Â±5% 50V Ceramic Capacitor C0G, NP0 0603 (1608 Metric)", Package="0603 Yageo", Check_prices=https://www.snapeda.com/parts/CC0603JRNPO9BN680/Yageo/view-part/?ref=eda, MF=Yageo, MP=CC0603JRNPO9BN680, SnapEDA_Link=https://www.snapeda.com/parts/CC0603JRNPO9BN680/Yageo/view-part/?ref=snap
D1 D4: "Small Signal Diode, SOD-80, 100V, 0.15A, 175Â°C", Package="SOD-80 Diotec", Check_prices=https://www.snapeda.com/parts/LL4148/Diotec/view-part/?ref=eda, MF="Diotec Semiconductor", MP=LL4148, SnapEDA_Link=https://www.snapeda.com/parts/LL4148/Diotec/view-part/?ref=snap
D2 D3 D5 D6 D7 D8 D9 D10: library part "D1 - SM6T6V8A", "13.4V Clamp 298A (8/20Âµs) Ipp Tvs Diode Surface Mount SMB (DO-214AA)", Package="DO-214 STMicroelectronics", Check_prices=https://www.snapeda.com/parts/SM6T6V8A/STMicroelectronics/view-part/?ref=eda, MF=STMicroelectronics, MP=SM6T6V8A, SnapEDA_Link=https://www.snapeda.com/parts/SM6T6V8A/STMicroelectronics/view-part/?ref=snap
FL1: library part 0.1uh-BLM18AG601SN1D, "0.1uHz 1 - Ferrite Bead 0603 (1608 Metric) 500mA 380mOhm", Package="1608 Murata", Availability="In Stock", Check_prices=https://www.snapeda.com/parts/BLM18AG601SN1D/Murata/view-part/?ref=eda, MF=Murata, MP=BLM18AG601SN1D, Price=None, Purchase-URL=https://pricing.snapeda.com/search/part/BLM18AG601SN1D/?ref=eda, SnapEDA_Link=https://www.snapeda.com/parts/BLM18AG601SN1D/Murata/view-part/?ref=snap
FL5: "0.1uHz 1 - Ferrite Bead 0603 (1608 Metric) 500mA 380mOhm", Package="1608 Murata", Availability="In Stock", Check_prices=https://www.snapeda.com/parts/BLM18AG601SN1D/Murata/view-part/?ref=eda, MF=Murata, MP=BLM18AG601SN1D, Price=None, Purchase-URL=https://pricing.snapeda.com/search/part/BLM18AG601SN1D/?ref=eda, SnapEDA_Link=https://www.snapeda.com/parts/BLM18AG601SN1D/Murata/view-part/?ref=snap
J1 R4: Package=None, Availability=Unavailable, Price=None
  J1: MP=1955918
  R4: MP=CRCW06033K90FKEAC
J2 J3: library part "J- 690-008-621-013", "Description", Manufacturer_Name=EDAC, Copyright="Copyright (C) 2025 Ultra Librarian. All rights reserved.", Manufacturer_Part_Number=690-008-621-013, RefDes=RefDes, Type="USB, DVI, HDMI, Connectors"
L1 L2 L3 L4: "2 Line Common Mode Choke Surface Mount 90 Ohms @ 100MHz 400mA DCR 190mOhm", Package="Horizontal-4 TDK", Availability=Unavailable, MF=TDK, MP=ACM2012-900-2P-T002, Price=None, SnapEDA_Link=https://www.snapeda.com/parts/ACM2012-900-2P-T002/TDK/view-part/12425/?ref=snap
P: library part "U1 - PC28F512P30BFB TR", "No Description Available", Manufacturer_Name=Micron, Copyright="Copyright (C) 2026 Ultra Librarian. All rights reserved.", Manufacturer_Part_Number="PC28F512P30BFB TR", RefDes=RefDes, Type=Type
R1 R2 R5 R6: library part "10k ohm - CRCW060310K0FKEA", "10 kOhms Â±1% 0.333W, 1/3W Chip Resistor 0603 (1608 Metric) Automotive AEC-Q200, Pulse Withstanding Thick Film", Package="1508 Vishay", Check_prices=https://www.snapeda.com/parts/CRCW060310K0FKEA/Vishay+Dale/view-part/?ref=eda, MF=Vishay, MP=CRCW060310K0FKEA, Purchase-URL=https://pricing.snapeda.com/search?q=CRCW060310K0FKEA&ref=eda, SnapEDA_Link=https://www.snapeda.com/parts/CRCW060310K0FKEA/Vishay+Dale/view-part/?ref=snap
R3: library part "1MHz - CRCW06031M00FKEA", "Resistor, Thick Film, 1 Megohms, 0.1 W, 1%, SMT, 0603, TCR 37 ppm/DegC, Cut Tape", Package="1508 Vishay", Check_prices=https://www.snapeda.com/parts/CRCW06031M00FKEA/Vishay+Dale/view-part/?ref=eda, MF=Vishay, MP=CRCW06031M00FKEA, SnapEDA_Link=https://www.snapeda.com/parts/CRCW06031M00FKEA/Vishay+Dale/view-part/?ref=snap
R7 R9: "Resistor, Thick Film, 100 Kilohms, 0.063 W, 1%, SMT, 0402, TCR 37 ppm/DegC, TR", Package="1005 Panasonic Electronic Components", Check_prices=https://www.snapeda.com/parts/CRCW0402100KFKED/Vishay+Dale/view-part/?ref=eda, MF=Vishay, MP=CRCW0402100KFKED, SnapEDA_Link=https://www.snapeda.com/parts/CRCW0402100KFKED/Vishay+Dale/view-part/?ref=snap
R8: library part "2.2K ohm - CRCW06032K20FKEAC", "2.2 kOhms Â±1% 0.1W, 1/10W Chip Resistor 0603 (1608 Metric) - Thick Film", Package="0603-2 Vishay", Check_prices=https://www.snapeda.com/parts/CRCW06032K20FKEAC/Vishay+Dale/view-part/?ref=eda, MF="Vishay Dale", MP=CRCW06032K20FKEAC, SnapEDA_Link=https://www.snapeda.com/parts/CRCW06032K20FKEAC/Vishay+Dale/view-part/?ref=snap
SW1: library part "SW - EVPASJC1A", "Description", Manufacturer_Name=Panasonic, Copyright="Copyright (C) 2026 Ultra Librarian. All rights reserved.", Manufacturer_Part_Number=EVPASJC1A
U1: library part "U3 - DAC811JU", "12-bit Digital-to-Analog Converter w/Parallel Interface 28-SOIC 0 to 70", Manufacturer_Name="Texas Instruments", Copyright="Copyright (C) 2026 Ultra Librarian. All rights reserved.", Datasheet=https://www.ti.com/lit/gpn/dac811, Manufacturer_Part_Number=DAC811JU, RefDes=RefDes, Type=Type
VR1 VR2: library part "100K variable res - 3266W-1-104LF", "100 kOhms 0.25W, 1/4W PC Pins Through Hole Trimmer Potentiometer Cermet 12 Turn Top Adjustment", Package="TO-218 Bourns", Availability="In Stock", Check_prices=https://www.snapeda.com/parts/3266W-1-104LF/Bourns/view-part/378417/?ref=eda, MF=Bourns, MP=3266W-1-104LF, Price=None, SnapEDA_Link=https://www.snapeda.com/parts/3266W-1-104LF/Bourns/view-part/378417/?ref=snap
Y1: library part "25 HZ- ECS-150-18-5PXEN", "CRYSTAL SMD", Package=None, Availability=Unavailable, MP=ECS-150-18-5PXEN, Price=None

## Via types
v1: diameter 1.27, hole 0.711, L1 to L8, 126 vias
v2: diameter 0.27, hole 0.09, L1 to L8, 31 vias

## Nets (pads, with @x,y where several pads share a name; then routed paths per layer and width w, separated by ;. In a path a pad name is that pad's centre, name@x,y a point inside that pad or via, vN(x,y) a via of type N, cw(c..) or ccw(c..) an arc to the next point about the centre after c; other vN are vias at no path point)
+5V: C3.2 C5.2 C7.2 C16.2 D1.A FL1.2 J2.1 J2.5 J3.1 J3.5 P.B1 P.C5 P.C6 P.D3 P.D6 P.E1 P.E2 P.E4 P.E5 P.F6 P.H6 P.H7 R1.2 R2.2 R7.2 U1.1 U3.7 U3.8 | length 274.4
  L1 w0.05: 53.086,48.283 53.086,48.941 53.318,49.174 P.B1 ; v2(57.277,47.295) 56.748,47.824 56.748,48.53 56.261,49.017 56.261,49.251 56.318,49.308 P.E1 P.E2 56.245,50.743 56.245,50.873 55.639,51.479 55.539,51.479 55.348,51.67 P.D3 P.E4 P.E5 55.823,54.165 55.113,54.165 54.619,53.67 P.C5 P.C6 P.D6 55.619,54.67 56.113,55.165 56.595,55.165 57.028,54.732 57.256,54.732 P.F6 57.813,55.165 57.813,55.865 58.113,56.165 58.823,56.165 59.296,55.692 P.H7@59.346,55.692
  L1 w0.25: 53.086,48.283 53.086,47.752 v2(54.585,46.253) ; FL1.2 54.202,40.235 54.712,40.745 v1(54.712,41.021) ; P.H6 59.318,55.661 59.328,55.67 P.H7@59.324,55.67 ; P.H7 P.H7@59.324,55.67 ; P.H7@59.346,55.692 P.H7@59.324,55.67 ; D1.A 76.753,64.059 77.439,64.745 v1(77.495,64.745) ; U3.8 U3.7 78.257,49.962 v1(78.562,49.657) ; R7.2 79.082,70.256 v1@79.807,70.256
  L1 w0.5: v1(79.578,82.525) 80.794,82.525 R2.2 ; v1@80.112,78.918 80.691,78.918 80.696,78.923 80.696,78.943 80.747,78.892 R1.2 ; C5.2 82.714,86.462 v1(83.947,86.462) ; U1.1 v1@87.147,86.462
  L1 w1: C3.2 v1@57.429,39.7 ; C16.2 76.67,41.097 v1@78.537,41.097
  L3 w0.5: v2(54.585,46.253) 54.712,46.126 v1(54.712,41.021) ; v1(79.731,78.892) 80.768,79.93 80.768,81.335 v1(79.578,82.525) 83.368,86.314 83.8,86.314 v1(83.947,86.462) 86.355,86.462 86.863,86.97 v1(87.071,86.97)
  L3 w1: J3.1 13.463,25.401 15.594,25.401 15.596,25.4 15.697,25.502 J3.5 22.403,31.922 22.403,54.788 24.663,57.048 34.061,57.048 34.722,56.388 v1(34.722,53.162) 34.795,53.162 35.379,52.578 38.176,52.578 49.733,41.021 v1(54.712,41.021) 54.763,40.969 56.29,40.969 57.306,39.954 v1(57.379,39.954) ; J2.5@15.955,80.245 11.86,80.245 10.422,78.807 10.422,75.074 13.462,72.034 13.462,66.929 20.93,59.461 35.154,59.461 38.354,56.261 v1@38.354,52.756 ; v1@57.43,39.903 60.985,36.347 77.292,36.347 78.74,37.795 v1(78.74,41.046) ; v1(78.562,49.657) 78.562,49.584 78.74,49.406 v1(78.74,41.046) ; v1(79.731,78.892) 79.731,78.819 81.509,77.041 81.509,71.73 v1(80.086,70.307) 80.086,67.335 v1(77.495,64.745) 80.061,64.745 81.102,63.703 81.102,42.291 79.858,41.046 v1(78.74,41.046)
  L8 w0.25: v2(54.585,46.253) 54.589,46.253 54.741,46.101 56.972,46.101 57.277,46.406 v2(57.277,47.295)
  L8 w0.381: C7.2 33.999,52.465 v1@34.493,52.959
  other v1: 38.227,52.603
+5V_A: C4.2 C9.2 C10.2 C11.2 FL1.1 | length 38.9
  L1 w0.254: C4.2 47.193,39.7 v1(47.295,39.802) ; v1(51.511,39.065) 51.74,39.294 FL1.1
  L3 w0.5: v1@32.995,49.124 33.096,49.022 33.096,46.914 v1(33.147,46.863) 34.414,45.596 41.501,45.596 v1(47.295,39.802) ; v1@33.02,49.098 v1(33.045,49.098) 33.084,49.136 33.084,55.258 v1@33.198,55.372 ; v1(33.122,55.22) v1@33.122,55.296
  L3 w1: v1(47.295,39.802) 47.33,39.767 50.736,39.767 51.438,39.065 v1(51.511,39.065)
  L8 w0.5: C10.2 31.386,49.626 32.467,49.626 v1@33.02,49.073 ; C9.2 32.473,46.138 v1@33.122,46.787 ; C11.2 31.527,55.276 33.065,55.276 v1(33.122,55.22)
+15V: C1.1 J1.3 J1.4 U1.20 VR1.3 VR2.1 | length 122.3
  L1 w0.25: U1.20 96.213,75.664 97.716,75.664 98.273,75.108 v1(98.273,74.193)
  L1 w0.254: C1.1 100.928,74.029 v1@100.965,74.066
  L3 w1: VR2.1 73.897,6.434 75.789,6.434 79.489,10.135 85.407,10.135 88.671,6.871 VR1.3@88.671,5.024 ; VR1.3 114.706,31.013 114.706,40.208 117.947,43.449 J1.3 J1.4 100.863,71.603 v1(100.863,74.346) 100.79,74.346 100.638,74.193 v1(98.273,74.193)
-15V: C2.1 J1.1 J1.2 U1.21 VR1.1 VR2.3 | length 126.6
  L1 w0.25: U1.21 v1@97.892,76.911 ; v1@100.533,77.114 100.736,77.318 100.736,78.574 C2.1
  L3 w1: VR2.3 83.337,5.232 VR1.1 85.496,3.073 89.125,3.073 91.894,5.842 105.613,5.842 123.368,23.597 123.368,32.182 122.474,33.076 122.474,34.752 J1.1 J1.2 125.119,42.619 125.119,51.615 123.976,52.758 122.355,52.758 104.038,71.074 104.038,73.135 100.402,76.772 v1@100.219,76.772 ; v1(98.222,76.657) 98.273,76.709 100.156,76.709 v1@100.219,76.772 ; v1(100.355,76.835) 100.282,76.835 v1@100.219,76.772
D1: P.B2 U1.16 U1.17 U1.18 | length 83.7
  L1 w0.025: v2(51.333,50.013) 51.942,50.013 52.082,50.153 52.801,50.153 P.B2
  L1 w0.25: v2(51.333,50.013) 51.333,46.914 52.73,45.517 v2(55.296,45.517) ; v2(65.964,40.056) 67.793,38.227 82.759,38.227 88.361,43.829 88.361,64.307 v1(94.158,70.104)
  L1 w0.381: v1(94.158,70.104) 94.615,70.561 U1.16 U1.17 U1.18
  L8 w0.25: v2(55.296,45.517) 63.932,45.517 65.964,43.485 v2(65.964,40.056)
D2: P.B3 U1.13 U1.14 U1.19 | length 98.8
  L1 w0.05: v2(51.333,50.927) 51.875,50.927 52.113,51.165 52.813,51.165 P.B3
  L1 w0.25: v2(51.333,50.927) 51.327,50.92 51.327,50.733 48.59,47.996 48.59,45.999 49.911,44.679 52.474,44.679 52.804,45.009 v2(55.372,45.009) ; v2(65.583,38.583) 66.442,37.723 82.968,37.723 89.535,44.29 v2(89.535,56.515)
  L1 w0.254: v1(85.09,68.91) 85.471,69.291 U1.14 U1.13 90.475,70.561 94.336,74.422 96.139,74.422 U1.19
  L8 w0.25: v2(55.372,45.009) 63.221,45.009 65.583,42.647 v2(65.583,38.583)
  L8 w0.254: v1@85.141,68.961 v1(85.09,68.91) 85.09,60.96 v2(89.535,56.515)
D3: P.B4 U1.10 U1.11 U1.12 | length 89.8
  L1 w0.05: P.B4 53.318,52.97 52.824,53.465 52.824,57.957 53.285,58.418 53.285,58.895 51.993,60.186 51.993,61.085 49.388,63.69 47.689,63.69 46.399,64.98 46.399,69.005 48.92,71.526 48.92,76.632 49.225,76.937 55.42,76.937 63.55,68.806 63.55,62.23 v2(63.856,61.925)
  L1 w0.254: v1@85.242,74.016 85.598,74.371 U1.10 87.147,74.27 87.097,74.219 87.097,73.254 87.147,73.203 U1.11 U1.12
  L8 w0.25: v2(63.856,61.925) 64.935,62.468 64.971,62.486 64.999,62.514 65.041,62.556 68.646,73.446 70.637,75.438 83.388,75.438 v1(85.115,73.711)
D4: P.B5 U1.7 U1.8 U1.9 | length 50.8
  L1 w0.05: P.B5 53.813,54.165 53.813,54.865 54.119,55.17 54.518,55.17 54.816,55.468 54.816,55.868 55.115,56.166 56.514,56.166 56.823,56.475 56.823,56.875 57.348,57.399 59.584,57.399 v2(60.782,58.598)
  L1 w0.254: v1(84.887,75.565) 84.925,75.603 87.109,75.603 U1.9 U1.8 U1.7
  L8 w0.25: v2(60.782,58.598) 60.808,58.598 60.833,58.572 60.858,58.598 63.884,58.598 64.138,58.344 66.363,58.344 ccw(c66.802,59.258) 67.241,58.344 72.512,58.344 72.585,58.417 72.659,58.491 72.659,58.666 72.881,58.888 73.634,58.888 84.351,69.604 84.351,71.653 86.029,73.332 86.029,74.422 v1(84.887,75.565)
GND: C1.2 C2.2 C3.1 C4.1 C5.1 C6.1 C7.1 C8.1 C9.1 C10.1 C11.1 C12.2 C13.2 C14.1 C15.1 C16.1 C17.2 C18.2 C19.1 C20.1 C21.1 C22.1 D2.2 D3.2 D5.1 D6.2 D7.2 D8.2 D9.1 D10.2 FL5.1 FL5.2 J1.5 J1.7 J1.8 J2.4 J2.8 J2.9 J2.10 J2.11 J2.12 J3.4 J3.8 J3.9 J3.10 J3.11 J3.12 P.G1 P.G2 P.G3 P.G6 P.G7 P.H2 P.H3 P.H4 R5.1 R6.1 SW1.2 U1.15 U1.23 U3.1 U3.2 U3.3 U3.4 | length 538.3
  L1 w0.05: P.G1 P.H2 ; P.G3 P.G2 P.H2 ; P.G7@58.344,55.651 58.318,55.626 P.G6 58.619,54.67 59.113,54.175 ; v2(60.3,54.178) 59.695,54.178 59.692,54.175 59.113,54.175 ; 59.113,54.175 58.823,53.885 58.823,53.465 59.113,53.175 59.49,53.175 59.665,53 59.665,52.959 59.376,52.67 P.H4 P.H3 P.H2
  L1 w0.381: v1(21.336,17.145) 21.343,17.138 21.343,15.448 C17.2 ; C18.2 21.35,19.9 v1(21.463,19.787) ; C22.1 21.412,25.668 21.412,24.613 v1(21.615,24.409) ; C21.1 21.477,28.942 v1(21.565,28.854) ; v1(22.885,71.526) 22.885,71.286 23.278,70.893 C12.2 ; v1@22.936,84.734 22.948,84.746 C14.1 ; C15.1 23.849,80.237 v1@23.851,80.239 ; C13.2 23.052,75.565 v1@23.876,75.565 ; D6.2 34.311,74.879 v1(36.144,74.879) 36.144,74.639 36.5,74.283 v1(36.5,68.809) 34.412,68.809 D5.1 ; D3.2 36.109,88.062 36.592,87.579 v1(36.83,87.579) ; D2.2 34.59,81.458 v1(36.83,81.458) ; D10.2 35.047,20.32 v1(36.754,20.32) ; D9.1 36.742,14.656 37.199,15.113 v1(37.44,15.113) ; D7.2 34.946,27.783 v1(35.027,27.864) ; D8.2 35.331,33.777 v1(35.362,33.807) ; C4.1 47.193,35.789 v1(47.625,35.357) ; C19.1 49.872,74.334 49.872,75.78 v1(49.962,75.87) ; v1(54.94,75.514) 55.37,75.084 C20.1 ; v1(55.753,10.389) 56.439,9.703 SW1.2 ; v1@55.982,36.627 v1(56.001,36.646) 56.021,36.666 C3.1 ; P.G7 58.325,55.67 P.G7@58.344,55.651 ; v2(60.3,54.178) 60.644,54.178 61.34,54.874 v2@64.846,54.874 ; v1(69.291,55.956) 69.291,56.642 69.774,57.125 71.857,57.125 71.907,57.175 C6.1 ; v1(70.485,41.351) 70.764,41.072 72.161,41.072 72.212,41.123 C16.1 ; v1(71.247,52.527) 71.247,51.341 71.356,51.232 U3.1 U3.2 U3.3 71.589,48.692 71.488,48.591 71.488,46.469 v1(71.374,46.355) ; v1(79.553,86.411) C5.1 ; v1(79.629,80.696) 80.794,80.696 R5.1 ; v1(79.629,84.303) 79.654,84.328 R6.1 ; v1@94.234,79.629 94.412,79.451 96.08,79.451 96.142,79.389 96.19,79.437 U1.23 ; U1.15 98.146,69.291 v1(98.476,69.621) ; C2.2 103.771,76.95 v1(104.064,76.657) ; C1.2 105.232,72.517 v1(105.435,72.72) 105.676,72.72 106.159,72.238 v1(113.538,72.238)
  L8 w0.381: J2.12@10.615,70.83 16.21,70.83 16.252,70.873 J2.10@16.295,70.83 ; J2.11@10.615,83.63 10.615,83.716 10.643,83.744 10.756,83.63 16.295,83.63 16.81,83.63 17.684,84.504 v1(22.872,84.504) 24.282,83.093 v1(24.282,80.264) 24.244,80.226 24.244,75.629 v1(24.206,75.59) v1@24.232,75.565 ; J3.12 J3.10 ; J3.11 J3.9 16.323,28.88 21.539,28.88 v1(21.565,28.854) ; J2.4@13.335,74.215 15.955,74.215 16.125,74.045 16.125,71 J2.10@16.21,70.915 ; J3.4@13.337,19.49 J3.8@15.957,19.49 ; J3.8 16.14,19.314 16.14,16.262 J3.10 ; J2.10 18.276,68.885 20.704,68.885 21.374,69.555 21.374,70.802 21.928,71.356 22.715,71.356 v1(22.885,71.526) 23.056,71.356 24.008,71.356 24.232,71.579 v1@24.232,75.565 ; v1@21.59,28.829 21.59,24.435 v1(21.615,24.409) 21.539,24.333 21.539,19.863 v1(21.463,19.787) 21.399,19.723 21.399,17.209 v1(21.336,17.145) ; v1(29.134,48.717) 29.134,48.958 28.561,49.53 C8.1 v1@31.267,52.019 ; v1@29.21,48.514 29.628,48.096 C10.1 ; v1@29.273,48.578 29.273,45.301 v1(29.413,45.161) 29.413,42.819 29.713,42.52 33.35,42.52 35.154,40.716 v1@35.154,33.833 ; v1@29.489,45.085 30.136,44.438 C9.1 ; v1@31.242,52.019 31.242,53.404 C11.1 33.94,53.633 34.163,53.856 34.163,55.931 36.5,58.268 v1(36.5,68.809) ; v1(31.293,52.045) 31.533,52.045 31.828,51.75 32.095,51.75 34.163,49.682 36.754,49.682 v1(37.592,50.521) 37.592,50.638 36.82,51.41 C7.1 ; v1(54.94,75.514) 54.7,75.514 54.344,75.87 v1(49.962,75.87) 44.374,81.458 v1(36.83,81.458) ; v1(55.753,10.389) 51.029,15.113 v1(37.44,15.113) ; v2(64.846,54.864) 65.938,55.956 v1(69.291,55.956) 71.247,54 v1(71.247,52.527) ; v1(71.374,46.355) 71.374,44.602 70.409,43.637 70.409,41.427 v1(70.485,41.351) 65.78,36.646 v1(56.001,36.646) 54.712,35.357 v1(47.625,35.357) 46.101,33.833 v1@35.154,33.833 ; v1(98.476,69.621) 104.064,75.209 v1(104.064,76.657) ; v1(105.435,72.72) 105.435,75.286 v1(104.064,76.657) ; FL5.1 FL5.2 ; FL5.2@107.671,50.063 107.721,50.013 108.776,50.013 109.31,50.546 v1(109.55,50.546) 118.059,50.546 122.352,54.839 122.352,55.067 122.642,55.357 122.642,56.52 124.809,58.688 124.809,63.227 123.165,64.872 123.165,64.922 123.292,65.049 122.352,65.989 J1.8@122.352,69.952 ; v1@113.843,72.136 115.646,72.136 117.704,70.078 117.831,69.952 J1.8@122.352,69.952 ; J1.8@122.352,70.307 J1.8@122.352,69.952 ; J1.8@123.165,69.952 J1.8@122.352,69.952 ; J3.10 20.296,16.105 v1(21.336,17.145) ; v1(21.336,17.145) 21.336,15.85 23.433,13.752 23.851,13.335 33.249,13.335 35.027,15.113 v1(37.44,15.113) ; v1@24.232,75.565 24.917,74.879 v1(36.144,74.879) 36.195,74.93 36.195,76.556 36.83,77.191 v1(36.83,81.458) ; v1@35.154,33.833 35.154,33.592 36.83,31.916 36.83,29.667 v1(35.027,27.864) 36.754,26.137 v1(36.754,20.32) 36.652,20.218 36.652,16.032 37.44,15.244 v1(37.44,15.113) ; v1(36.83,81.458) v1(36.83,87.579) 37.935,86.474 79.489,86.474 v1(79.553,86.411) 79.591,86.373 79.591,84.341 v1(79.629,84.303) 78.334,83.007 78.334,81.991 v1(79.629,80.696) 93.137,80.696 93.95,79.883 v1(94.031,79.883) 97.117,76.797 97.117,75.854 97.546,75.425 101.311,75.425 101.704,75.032 102.438,75.032 v1(104.064,76.657)
NetC6_2: C6.2 C8.2 | length 77.5
  L1 w0.381: v1@18.974,55.499 21.819,58.344 35.281,58.344 37.059,60.122 v1(39.167,60.122) ; v1(43.815,59.563) 49.911,59.563 v1@51.029,60.681 ; v2(60.554,60.274) 66.291,60.274 66.355,60.338 76.321,60.338 78.443,58.215 78.443,57.574 v1(78.613,57.404) 76.327,57.404 76.251,57.328 C6.2
  L8 w0.381: v1(18.948,55.499) 18.948,53.01 19.939,52.019 C8.2 ; v1(39.167,60.122) 39.407,60.122 40.055,59.474 43.726,59.474 v1(43.815,59.563) ; v1@50.952,60.731 50.978,60.706 v1(51.079,60.706) 60.122,60.706 v2(60.554,60.274)
NetC19_2: C19.2 P.C7 Y1.1 | length 24
  L1 w0.05: v2(53.823,58.928) 53.823,56.166 54.286,55.702 P.C7@54.305,55.702
  L1 w0.25: Y1.1 49.53,67.31 v1(53.086,67.31) ; C19.2 53.086,72.464 v1(53.086,67.31) ; v2(53.823,58.928) 52.502,60.249 52.502,66.673 53.086,67.257 v1(53.086,67.31) ; P.C7@54.305,55.702 54.318,55.689 P.C7
NetC20_2: C20.2 P. Y1.2 | length 28.9
  L1 w0.2: P. 54.318,57.976 55.118,58.776 v2(55.118,59.817) 55.423,60.122 59.055,60.122 62.636,63.703
  L1 w0.254: C20.2 62.636,68.502 v1(62.636,67.386) ; Y1.2 62.306,67.412 v1@62.332,67.386
  L1 w0.5: 62.636,63.703 v1(62.636,67.386)
NetD1_C: D1.C D4.A R7.1 R8.2 R9.2 | length 28.9
  L1 w0.254: R9.2 67.145,65.215 v1(67.97,66.04) ; R8.2 66.523,58.75 v1@66.726,58.953 ; D1.C 72.04,65.36 v1(72.441,65.761) ; D4.A 76.27,69.78 76.505,69.545 v1(76.543,69.545) 78.114,71.117 79.028,71.117 R7.1
  L8 w0.254: v1(66.802,59.258) 68.021,59.258 68.936,60.173 68.936,65.075 v1@68.11,65.9 ; v1(67.97,66.04) v1@68.11,65.9 ; v1(76.543,69.545) 76.384,69.545 72.6,65.761 v1(72.441,65.761) 72.301,65.9 v1@68.11,65.9
NetD4_C: D4.C R9.1 | length 11
  L1 w0.254: R9.1 66.287,64.281 67.444,64.281 v1(67.488,64.237) 69.088,64.237 71.653,66.802 71.653,68.631 v1(72.568,69.545) ; D4.C 72.37,69.971 v1@72.466,69.875
NetP_E8: P.E8 SW1.1 | length 58.8
  L1 w0.3: P.E8 56.318,57.336 56.337,57.355 v2(56.337,58.725) ; v2(63.322,54.28) 63.322,15.519 65.456,13.386 v1(65.456,10.287)
  L1 w0.5: SW1.1 64.872,9.703 v1(65.456,10.287)
  L8 w0.3: v2(56.337,58.725) 59.851,58.725 63.322,55.254 v2(63.322,54.28)
NetP_G4: P.G4 R8.1 | length 20.2
  L1 w0.05: P.G4 58.318,52.37 57.823,51.875 57.823,49.465 58.241,49.047 v2(60.249,49.047)
  L1 w0.25: v2@64.063,50.698 65.278,50.698 v1(68.377,53.797)
  L1 w0.5: R8.1 66.523,54.31 66.992,53.841 68.333,53.841 v1(68.377,53.797)
  L8 w0.25: v2(60.249,49.047) 60.255,49.054 62.414,49.054 v2(64.059,50.698)
NetR1_1: R1.1 U1.6 | length 5
  L1 w0.254: R1.1 82.401,78.952 82.704,79.255 82.764,79.255 82.959,79.451 U1.6
NetR2_1: R2.1 U1.4 | length 4.9
  L1 w0.254: R2.1 82.477,82.372 83.82,82.372 84.201,81.991 U1.4
NetR3_1: R3.1 U1.26 U1.27 | length 9.6
  L1 w0.254: U1.26 U1.27 97.066,84.531 98.958,86.423 98.958,88.621 100.152,89.814 R3.1
NetR3_2: R3.2 VR1.2 | length 93.2
  L1 w0.254: v1@102.54,88.722 102.568,88.751 R3.2
  L8 w0.254: VR1.2 86.131,16.993 103.886,34.747 103.886,69.734 107.721,73.569 107.721,83.287 v1(102.514,88.494)
NetR4_1: R4.1 U1.22 | length 9
  L1 w0.254: U1.22 96.241,78.13 v1@97.917,78.13 ; v1(98.171,78.181) 100.584,80.594 v1(100.584,83.16) ; v1@100.635,83.49 100.635,83.515 100.82,83.7 R4.1
NetR4_2: R4.2 VR2.2 | length 88
  L1 w0.254: VR2.2 102.514,35.052 v1(102.514,83.312) ; R4.2 102.38,83.497 v1@102.387,83.49
NetR5_2: R5.2 U1.3 U1.5 | length 9.6
  L1 w0.254: R5.2 82.451,80.721 U1.5 88.024,80.721 88.684,81.382 88.684,82.601 88.024,83.261 U1.3
NetR6_2: R6.2 U1.2 | length 4.8
  L1 w0.254: R6.2 82.655,84.531 U1.2
SCL: P.F2 U3.6 | length 25.4
  L1 w0.05: P.F2 56.823,50.175 56.823,49.065 56.947,48.941 56.947,48.321 58.024,47.244 v2(58.598,47.244)
  L1 w0.25: v2(66.929,47.346) 68.934,45.341 71.884,45.341 v1(75.209,48.666)
  L1 w0.5: v1(75.209,48.666) 75.235,48.692 U3.6
  L8 w0.25: v2(58.598,47.244) 66.822,47.244 66.924,47.346 v2(66.929,47.346)
SDA: P.H5 U3.5 | length 20.5
  L1 w0.05: P.H5 60.3,53.67 v2@60.376,53.594
  L1 w0.5: v1@75.413,47.092 75.724,47.403 76.983,47.403 U3.5
  L8 w0.25: v2(60.35,53.594) 60.357,53.587 65.576,53.587 72.402,46.761 v1(75.159,46.761)
USB_CM_DP1+: L2.4 P.A7 | length 33.9
  L1 w0.3: 45.669,55.753 51.714,55.753 51.796,55.671 52.317,55.671 P.A7
  L1 w0.381: L2.4 42.559,79.067 44.269,79.067 v1(44.272,79.07) 44.272,76.733 42.316,74.778 42.316,59.106 45.669,55.753
USB_CM_DP1-: L2.3 P.A6 | length 32.4
  L1 w0.3: v2(50.47,54.889) 51.589,54.889 51.809,54.67 P.A6
  L1 w0.381: L2.3 42.556,78.262 42.563,78.254 42.563,77.386 v1(41.681,76.505) 41.681,58.369 45.161,54.889 v2(50.47,54.889)
USB_CM_DP2+: L1.4 P.A5 | length 37.6
  L1 w0.2: v2(51.384,54.127) 51.664,54.127 51.689,54.102 51.968,54.102 52.273,53.797 52.273,53.772 52.318,53.727 P.A5
  L1 w0.381: L1.4 43.835,85.414 44.032,85.217 v1(44.272,85.217) 47.803,81.686 v1(47.803,76.149)
  L8 w0.381: v1(47.803,76.149) 47.803,75.916 47.066,75.18 47.066,59.487 51.384,55.169 v2(51.384,54.127)
USB_CM_DP2-: L1.3 P.A4 | length 39.3
  L1 w0.025: P.A4 52.365,52.67 P.A4@52.375,52.68
  L1 w0.2: v2(51.308,52.68) P.A4@52.375,52.68
  L1 w0.381: L1.3 42.522,84.614 42.512,84.604 42.512,83.051 v1(42.469,83.007) 43.468,82.008 44.129,82.008 46.253,79.883 v1(46.253,77.572)
  L8 w0.381: v1(46.253,77.572) 46.196,77.514 46.196,76.365 44.958,75.127 44.958,73.203 46.253,71.907 46.253,65.049 44.958,63.754 44.958,59.03 v2(51.308,52.68)
USB_CM_DPP1+: L4.4 P.C4 | length 37.4
  L1 w0.05: P.C4@54.407,52.629 54.407,52.582 54.813,52.175 54.813,51.475 55.113,51.175 55.513,51.175 55.823,50.865 55.823,49.465 55.804,49.485 55.804,47.447 v2(56.032,47.219)
  L1 w0.254: L4.4 42.588,23.202 42.588,24.569 v1(42.545,24.613) 45.217,27.284 45.659,27.284 48.136,29.761 48.136,32.261 53.289,37.414 54.565,37.414 56.312,39.161 56.312,46.38 56.032,46.66 v2@56.032,47.214 ; P.C4 54.365,52.67 P.C4@54.407,52.629
USB_CM_DPP1-: L4.3 P.C3 | length 36.1
  L1 w0.05: P.C3@54.318,51.651 54.318,51.37 54.813,50.875 54.813,48.996 55.27,48.539 v2(55.27,47.777)
  L1 w0.254: L4.3 42.654,22.381 44.479,22.381 v1(44.501,22.403) 44.526,22.403 53.721,31.598 v2(53.721,36.398) ; P.C3 54.337,51.67 P.C3@54.356,51.689
  L8 w0.254: v2(53.721,36.398) 53.721,38.909 53.696,38.935 53.696,46.203 v2(55.27,47.777)
USB_CM_DPP2+: L3.4 P.C2 | length 29.4
  L1 w0.025: v2(51.13,51.791) 51.757,51.791 52.119,52.153 53.518,52.153 53.836,51.835 53.836,51.153 P.C2
  L1 w0.05: 50.908,51.581 50.908,51.622 51.031,51.746 v2@51.031,51.791
  L1 w0.254: L3.4 42.378,30.897 v1(43.205,31.725) 43.205,43.282 50.419,50.495 50.419,51.092 50.908,51.581
USB_CM_DPP2-: L3.3 P.C1 | length 28.7
  L1 w0.254: L3.3 42.381,29.569 43.761,29.569 v1(43.764,29.566) 52.146,37.948 54.38,37.948 55.728,39.296 55.728,46.126 v2(53.924,47.93)
  L1 w0.3: v2(53.924,47.93) 53.924,49.228 54.305,49.609 54.305,49.632 54.318,49.645 P.C1
USB_DP1+: C15.2 D6.1 J2.2 L2.2 | length 35.1
  L1 w0.381: v1@19.845,80.068 v1@20.013,80.237 ; v1(20.015,80.239) v1@20.013,80.237 ; D6.1 29.85,76.678 v1(29.794,76.733) 29.883,76.822 38.9,76.822 v1(38.989,76.911) 38.989,77.112 40.132,78.254 40.696,78.254 L2.2 ; v1@29.85,76.746 22.974,76.746 21.278,78.443 21.278,80.237 C15.2 v1@20.013,80.237
  L8 w0.381: J2.2@13.36,78.217 14.53,79.387 14.53,80.429 15.496,81.395 18.859,81.395 v1(20.015,80.239)
USB_DP1-: C14.2 D5.2 J2.3 L2.1 | length 61.3
  L1 w0.381: C14.2 21.236,85.838 20.283,85.838 v1(19.329,86.792) 19.329,84.42 16.611,81.701 15.802,81.701 14.53,80.429 14.53,77.377 13.36,76.207 14.53,75.037 14.53,73.994 15.496,73.028 19.982,73.028 20.715,73.762 26.924,73.762 v1(27.788,72.898) ; v1(27.229,70.663) 27.229,72.099 27.788,72.657 v1(27.788,72.898) ; D5.2 29.901,70.861 27.864,72.898 v1(27.788,72.898) ; v1(38.811,79.121) 38.859,79.073 40.696,79.073 L2.1
  L8 w0.381: v1(27.229,70.663) 36.912,70.663 37.795,71.546 37.795,78.105 v1(38.811,79.121)
USB_DP2+: C12.1 D3.1 J2.6 L1.2 | length 57.1
  L1 w0.381: v1(19.228,74.066) 19.058,74.237 19.058,75.174 16.015,78.217 15.98,78.217 18.425,78.217 18.936,78.727 18.936,80.686 19.568,81.318 21.526,81.318 27.178,86.97 27.178,89.591 27.808,90.221 v1(29.87,90.221) 30.048,90.043 D3.1@30.048,88.062 ; v1(19.66,71.196) 19.7,71.156 19.7,70.292 20.028,69.964 21.54,69.964 C12.1 ; D3.1@29.118,88.966 30.022,88.062 D3.1 ; v1@30.048,90.221 40.818,90.221 41.58,89.459 41.58,83.566 41.265,83.251 41.2,83.251 40.881,82.931 v1(40.64,82.931) ; v1@40.706,82.997 L1.2
  L8 w0.381: v1(19.228,74.066) 19.228,73.826 19.66,73.394 v1(19.66,71.196)
USB_DP2-: C13.1 D2.1 J2.7 L1.1 | length 32.5
  L1 w0.381: v1@20.166,75.538 C13.1 ; C13.1@21.394,75.634 21.463,75.565 C13.1@21.463,75.449 ; v1(22.885,78.511) 24.155,78.511 28.981,83.337 v1(30.074,83.337) 32.156,85.42 v1(39.116,85.42) 39.119,85.417 40.702,85.417 L1.1 ; v1@30.074,83.21 30.078,83.206 D2.1
  L8 w0.381: J2.7@15.98,76.207 19.129,76.207 19.872,75.463 v1(20.091,75.463) 20.091,75.59 22.885,78.384 v1(22.885,78.511)
USB_DPP1+: C22.2 D10.1 J3.2 L4.2 | length 35.1
  L1 w0.254: J3.2 13.437,23.419 13.437,23.566 14.558,24.687 14.558,25.64 15.538,26.619 22.049,26.619 22.616,26.052 22.677,26.052 23.02,25.71 23.02,25.649 23.546,25.123 v1(23.546,23.8) ; v1(39.014,21.59) 39.783,22.358 L4.2
  L1 w0.5: D10.1 30.383,21.691 30.81,22.118 v1(30.81,22.327) ; v1@34.392,22.047 v1(34.417,22.073) 38.323,22.073 38.806,21.59 v1(39.014,21.59)
  L8 w0.254: v1(23.546,23.8) 26.441,23.8 27.915,22.327 v1(30.81,22.327)
  L8 w0.5: v1(30.81,22.327) 33.955,22.327 34.209,22.073 v1(34.417,22.073)
USB_DPP1-: C21.2 D9.2 J3.3 L4.1 | length 50.5
  L1 w0.254: J3.3 12.258,22.586 12.258,26.202 13.081,27.026 21.438,27.026 v1(23.165,28.753) 23.165,30.175 23.177,30.187 C21.2 ; v1(28.372,27.534) 28.372,27.346 28.997,26.721 28.997,24.77 29.942,23.825 33.952,23.825 v1(39.014,23.825) 39.118,23.825 39.784,23.158 L4.1
  L1 w0.5: v1@30.277,16.916 30.51,16.683 D9.2 ; v1(30.353,17.12) 31.987,18.754 31.987,21.861 33.952,23.825
  L8 w0.254: v1(23.165,28.753) 24.384,27.534 v1(28.372,27.534)
  L8 w0.5: v1@30.277,17.196 30.302,17.196 30.353,17.145 v1(30.353,17.12)
USB_DPP2+: C17.1 D8.1 J3.6 L3.2 | length 43.4
  L1 w0.254: J3.6 18.593,20.881 18.593,20.142 20.447,18.288 21.63,18.288 22.716,17.201 22.716,16.882 v1(22.911,16.688) 24.359,16.688 27.127,19.456 27.127,23.125 28.143,24.141 28.143,25.629 27.232,26.539 27.232,28.858 28.296,29.921 v1@30.785,29.921 ; v1@39.37,29.032 39.91,29.572 L3.2
  L1 w0.5: v1(22.911,16.688) 23.05,16.549 C17.1 ; v1@30.785,29.921 38.089,29.921 39.207,28.804 v1(39.268,28.804) ; D8.1 30.921,29.967 v1(30.993,29.896)
USB_DPP2-: C18.1 D7.1 J3.7 L3.1 | length 46.9
  L1 w0.254: v1(20.168,22.428) 20.193,22.403 22.885,22.403 v1(22.911,22.377) ; C18.1 22.911,21.168 v1(22.911,22.377) ; v1(27.127,24.562) 24.943,22.377 v1(22.911,22.377) ; v1(39.167,30.455) 39.208,30.413 40.487,30.413 L3.1
  L1 w0.5: D7.1 30.536,27.462 30.709,27.635 v1(30.709,27.661) 33.213,27.661 34.555,29.003 35.498,29.003 36.837,27.665 39.908,27.665 41.407,29.163 41.407,31.491 40.716,32.182 39.522,32.182 39.167,31.826 v1(39.167,30.455)
  L8 w0.254: J3.7 19.498,21.482 19.677,21.661 19.677,21.663 20.168,22.153 v1(20.168,22.428) ; v1(27.127,24.562) 27.322,24.367 27.322,23.885 28.372,22.835 28.956,22.835 29.464,23.343 31.231,23.343 32.283,24.395 32.283,26.086 v1(30.709,27.661)
VOUT: J1.6 U1.24 | length 50.7
  L1 w0.254: U1.24 97.993,80.721 v1@98.019,80.747 ; v1(98.425,80.823) 98.619,81.017 98.619,81.471 98.628,81.48 98.628,84.861 99.296,85.53 114.064,85.53 117.918,81.676 117.992,81.601 117.992,65.636 117.992,65.635 ccw(c118.246,65.636) 118.066,65.457 ccw(c142.95,90.486) 122.263,61.89 122.277,61.876 122.352,61.802 J1.6@122.352,60.147
pads on no net: P.A1 P.A2 P.A3 P.A8 P.B6 P.B7 P.B8 P.D1 P.D2 P.D4 P.D5 P.D7 P.D8 P.E3 P.E6 P.E7 P.F1 P.F3 P.F4 P.F5 P.F7 P.F8 P.G5 P.G8 P.H1 P.H8 U1.25 U1.28

## Polygon pours and split planes (outlines as drawn)
+5V on L4 (split plane): 126.744,0.51 0.51,0.51 0.51,100.785 126.744,100.785
GND on L2 (split plane): 126.744,0.51 0.51,0.51 0.51,100.785 126.744,100.785
+5V on L5 (split plane): 126.744,0.51 0.51,0.51 0.51,100.785 126.744,100.785
+15V on L7 (split plane): 126.744,0.51 0.51,0.51 0.51,100.785 126.744,100.785

## Text inside footprints (layer, text, board x,y; h text height)
C6: Top Overlay "RefDes" at 72.174,56.617 h1.27; Top Overlay "REFDES" at 71.857,56.617 h1.27; Mechanical 13 "RefDes2" at 71.857,56.617 h1.27
C16: Top Overlay "RefDes" at 72.568,40.488 h1.27; Top Overlay "REFDES" at 72.25,40.488 h1.27; Mechanical 13 "RefDes2" at 72.25,40.488 h1.27
J2: Top Overlay "RefDes" at 14.002,79.178 h1.27 r270; Top Overlay "REFDES" at 14.002,79.495 h1.27 r270; Mechanical 13 "RefDes2" at 14.002,79.495 h1.27 r270
J3: Top Overlay "RefDes" at 14.012,24.41 h1.27 r270; Top Overlay "REFDES" at 14.012,24.728 h1.27 r270; Mechanical 13 "RefDes2" at 14.012,24.728 h1.27 r270
P: Top Overlay "8" at 49.301,57.658 h1.27 r180; Top Overlay "1" at 51.183,50.305 h1.27 r180; Top Overlay "H" at 59.953,46.896 h1.27 r90; Top Overlay "A" at 52.953,46.896 h1.27 r90; Mechanical 13 "8" at 51.183,57.305 h1.27 r180; Mechanical 13 "1" at 51.183,50.305 h1.27 r180; Mechanical 13 "H" at 59.953,46.896 h1.27 r90; Mechanical 13 "A" at 52.953,46.896 h1.27 r90; Bottom Overlay "8" at 49.301,56.286 h1.27; Bottom Overlay "1" at 51.183,49.035 h1.27; Bottom Overlay "H" at 58.776,46.685 h1.27 r90; Bottom Overlay "A" at 52.953,47.531 h1.27 r90
U1: Top Overlay "*" at 86.576,86.233 h1.27; Mechanical 13 "*" at 86.576,86.233 h1.27